# Altium PCB BioZ.PcbDoc (part 1 of 3)
Units mm, origin at the board's own origin, x right, y up, seen from the top; angles counter-clockwise.
Board outline 88 x 75 mm, 4 copper layers (Top Layer, GND1, GND 2, Bottom Layer), stack 1.564 mm thick; 174 components, 106 nets, 519 pads, 307 vias.
Unrouted connection lines stored in the file: 5.
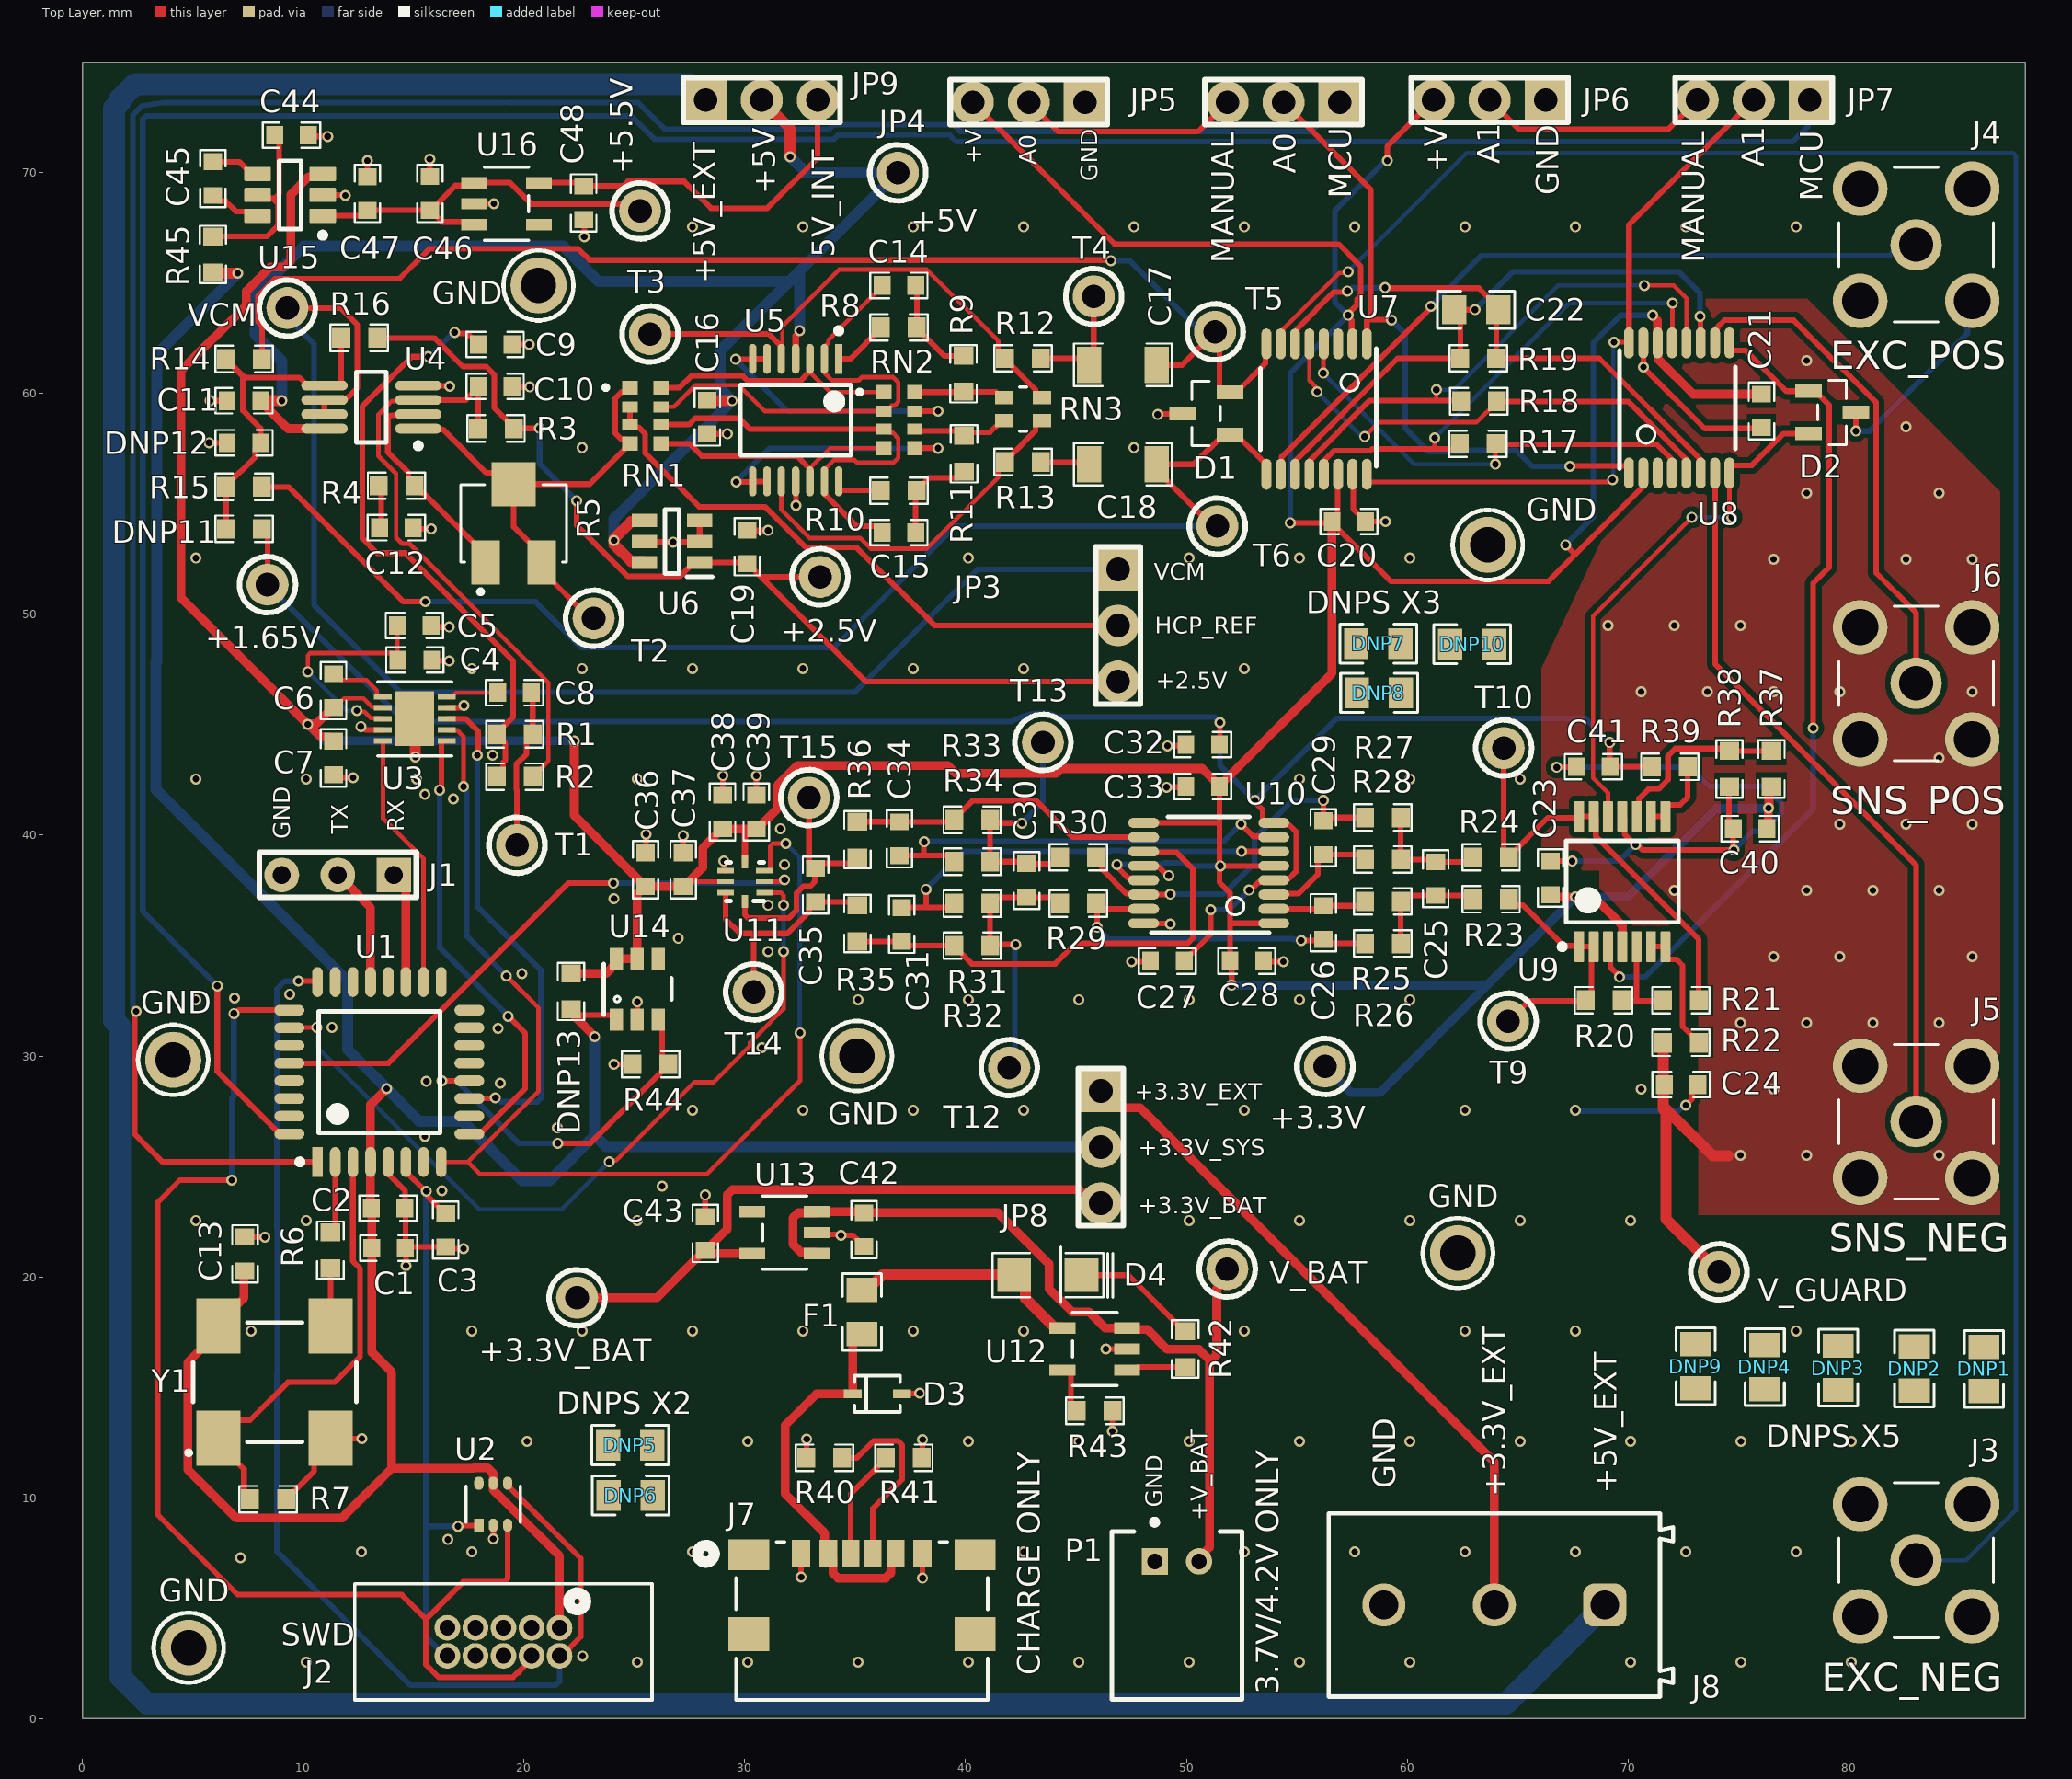
[diagram p0: Top Layer view]
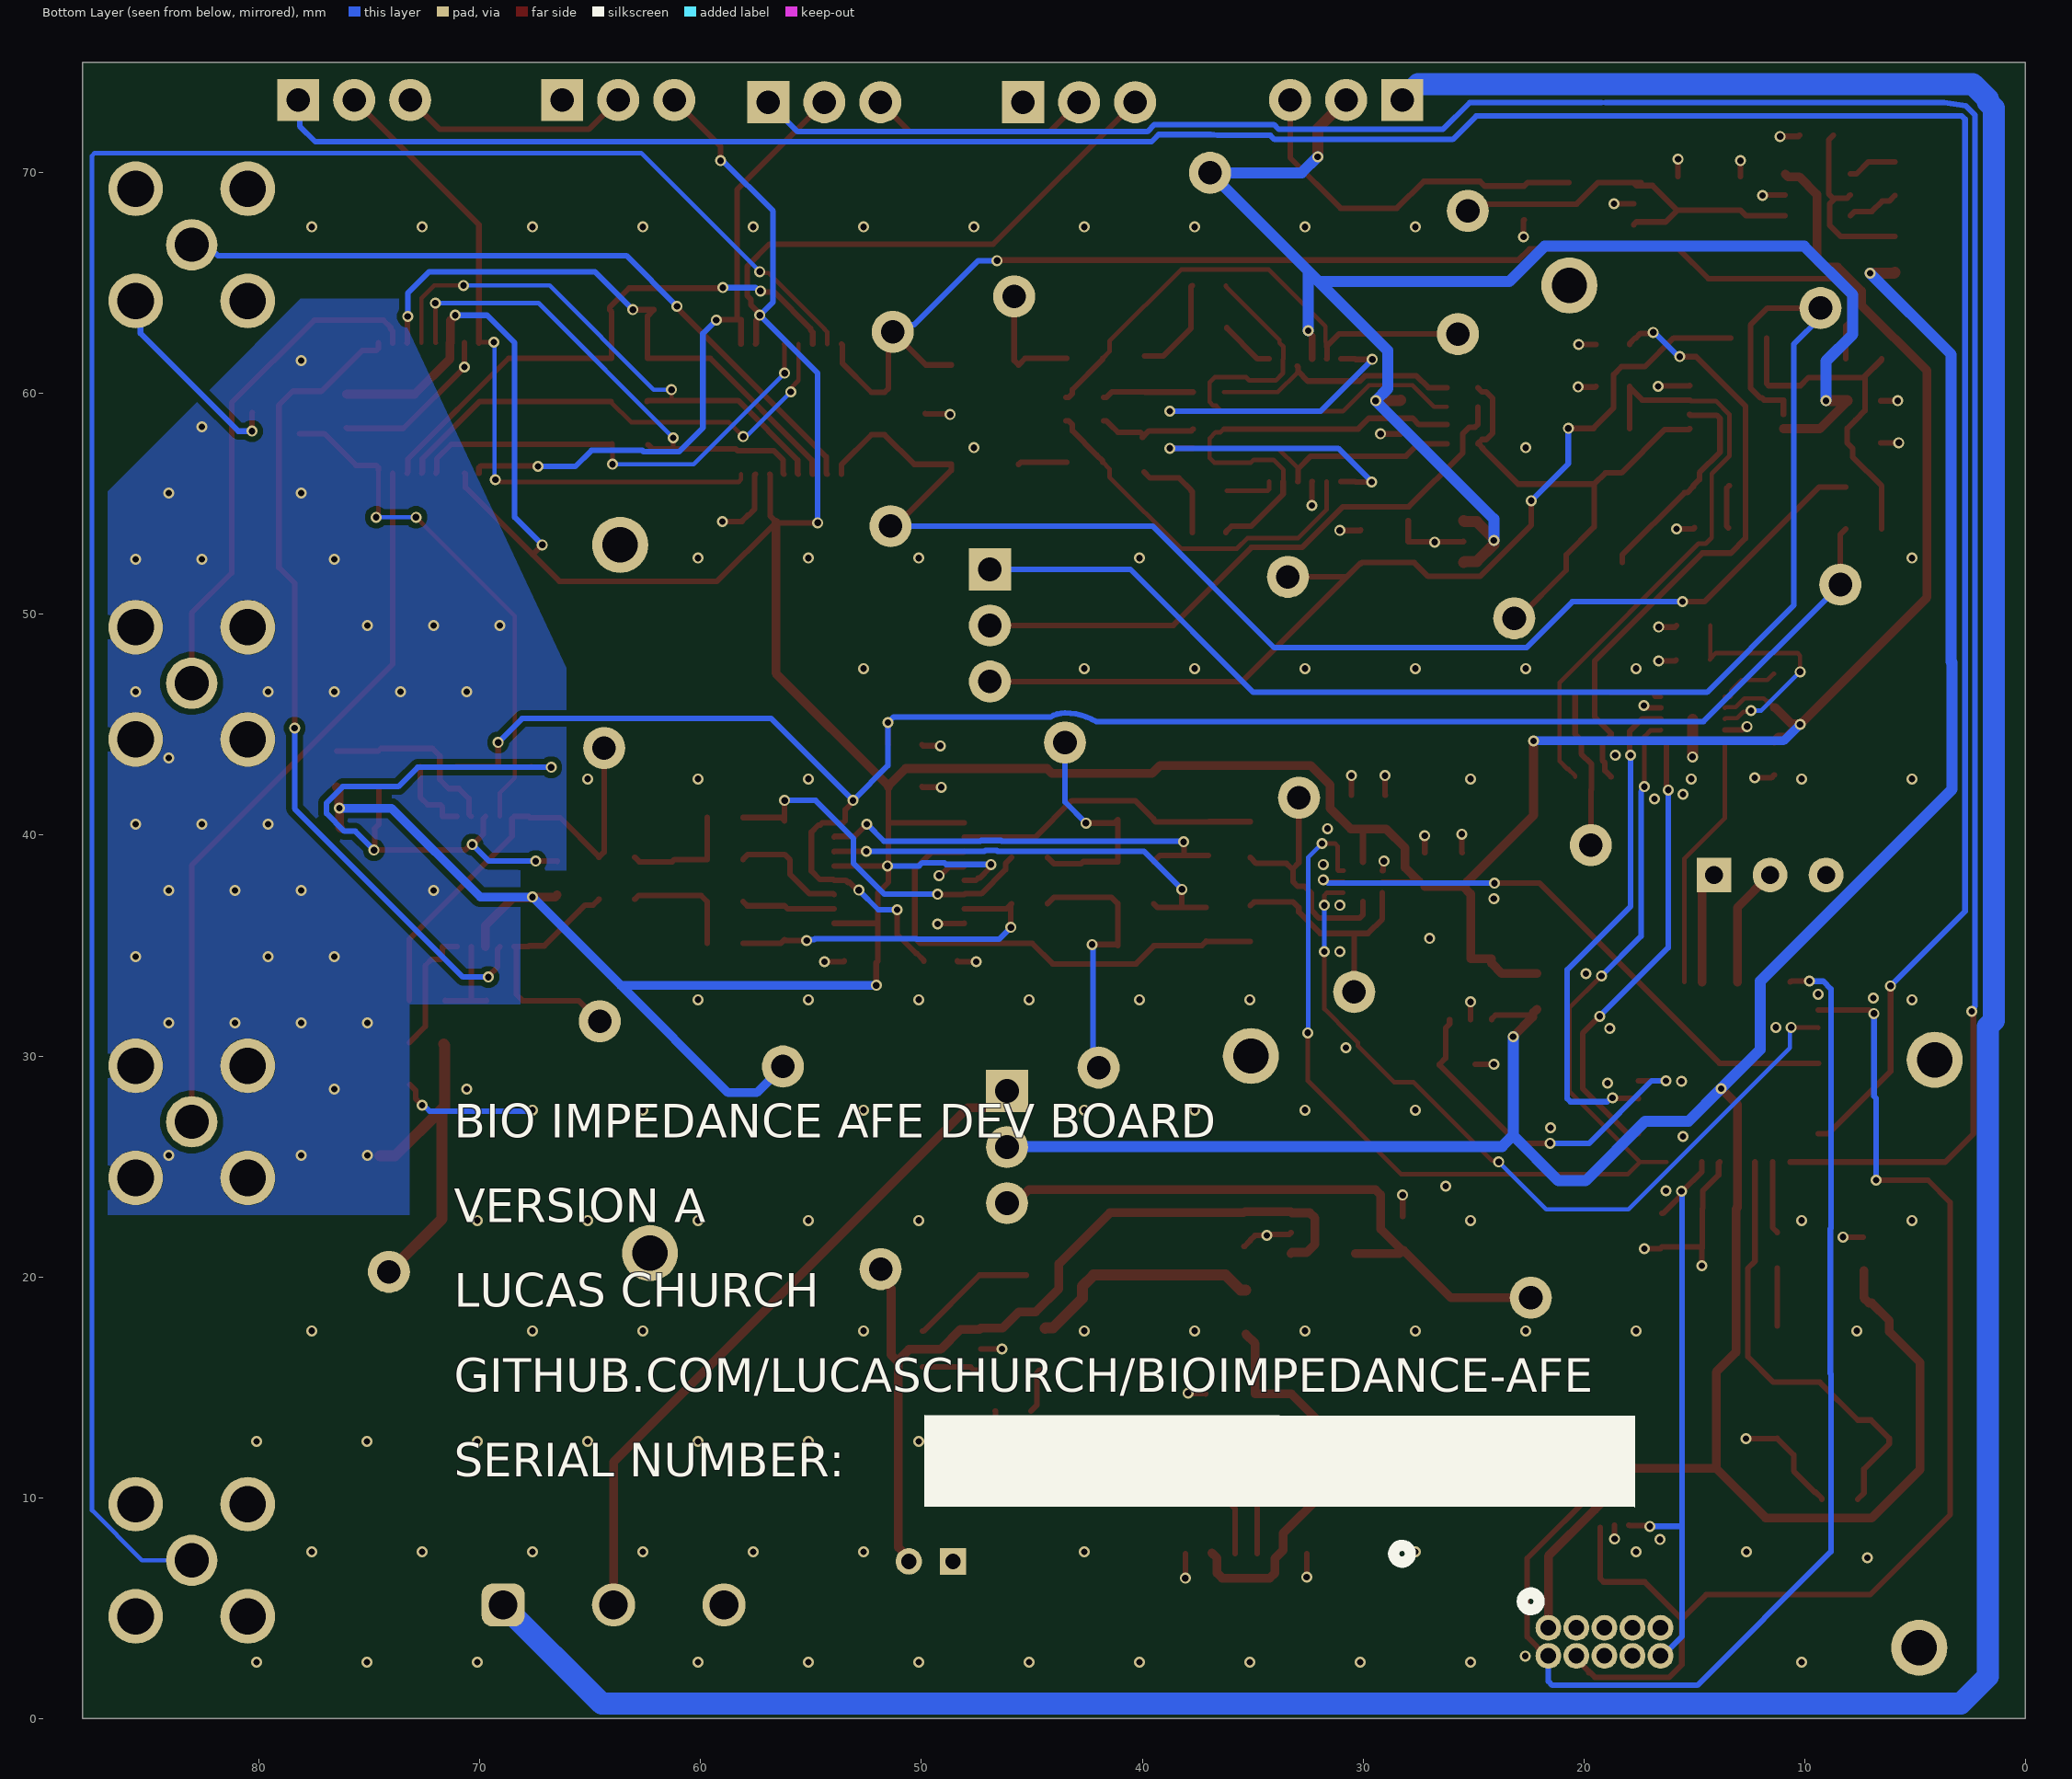
[diagram p1: Bottom Layer view, seen from below]
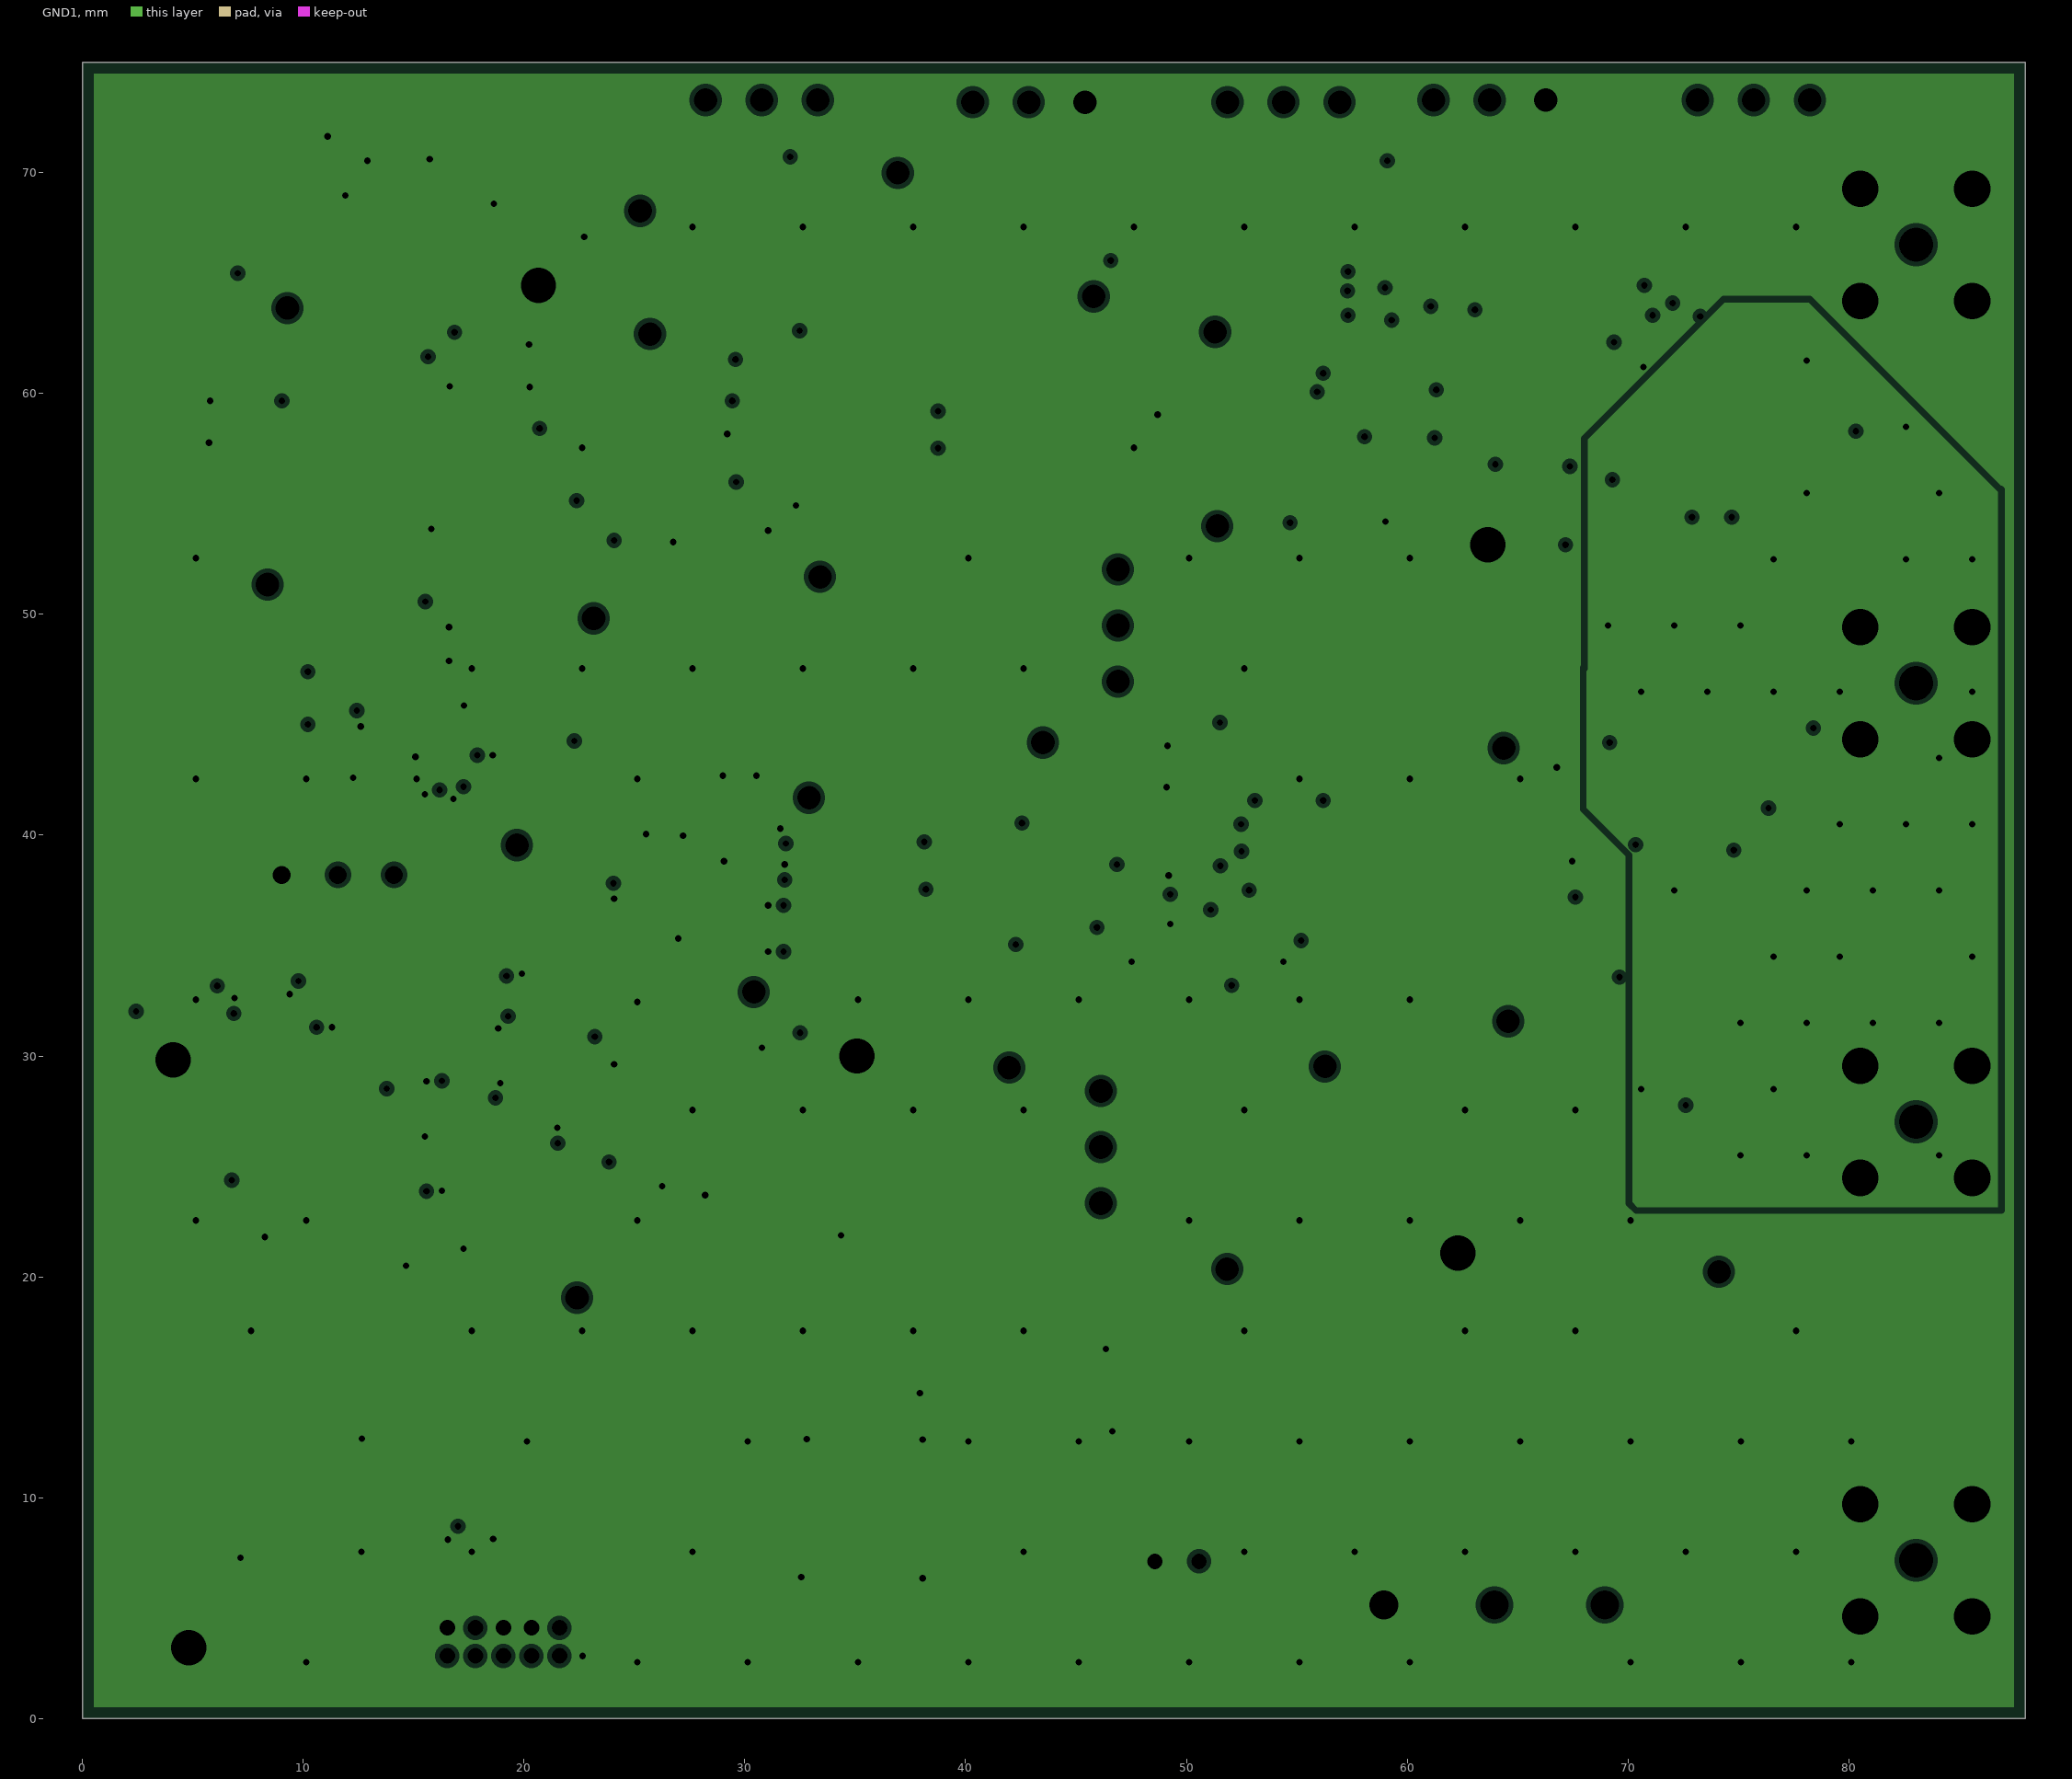
[diagram p2: GND1, clearances drawn from the general rule]
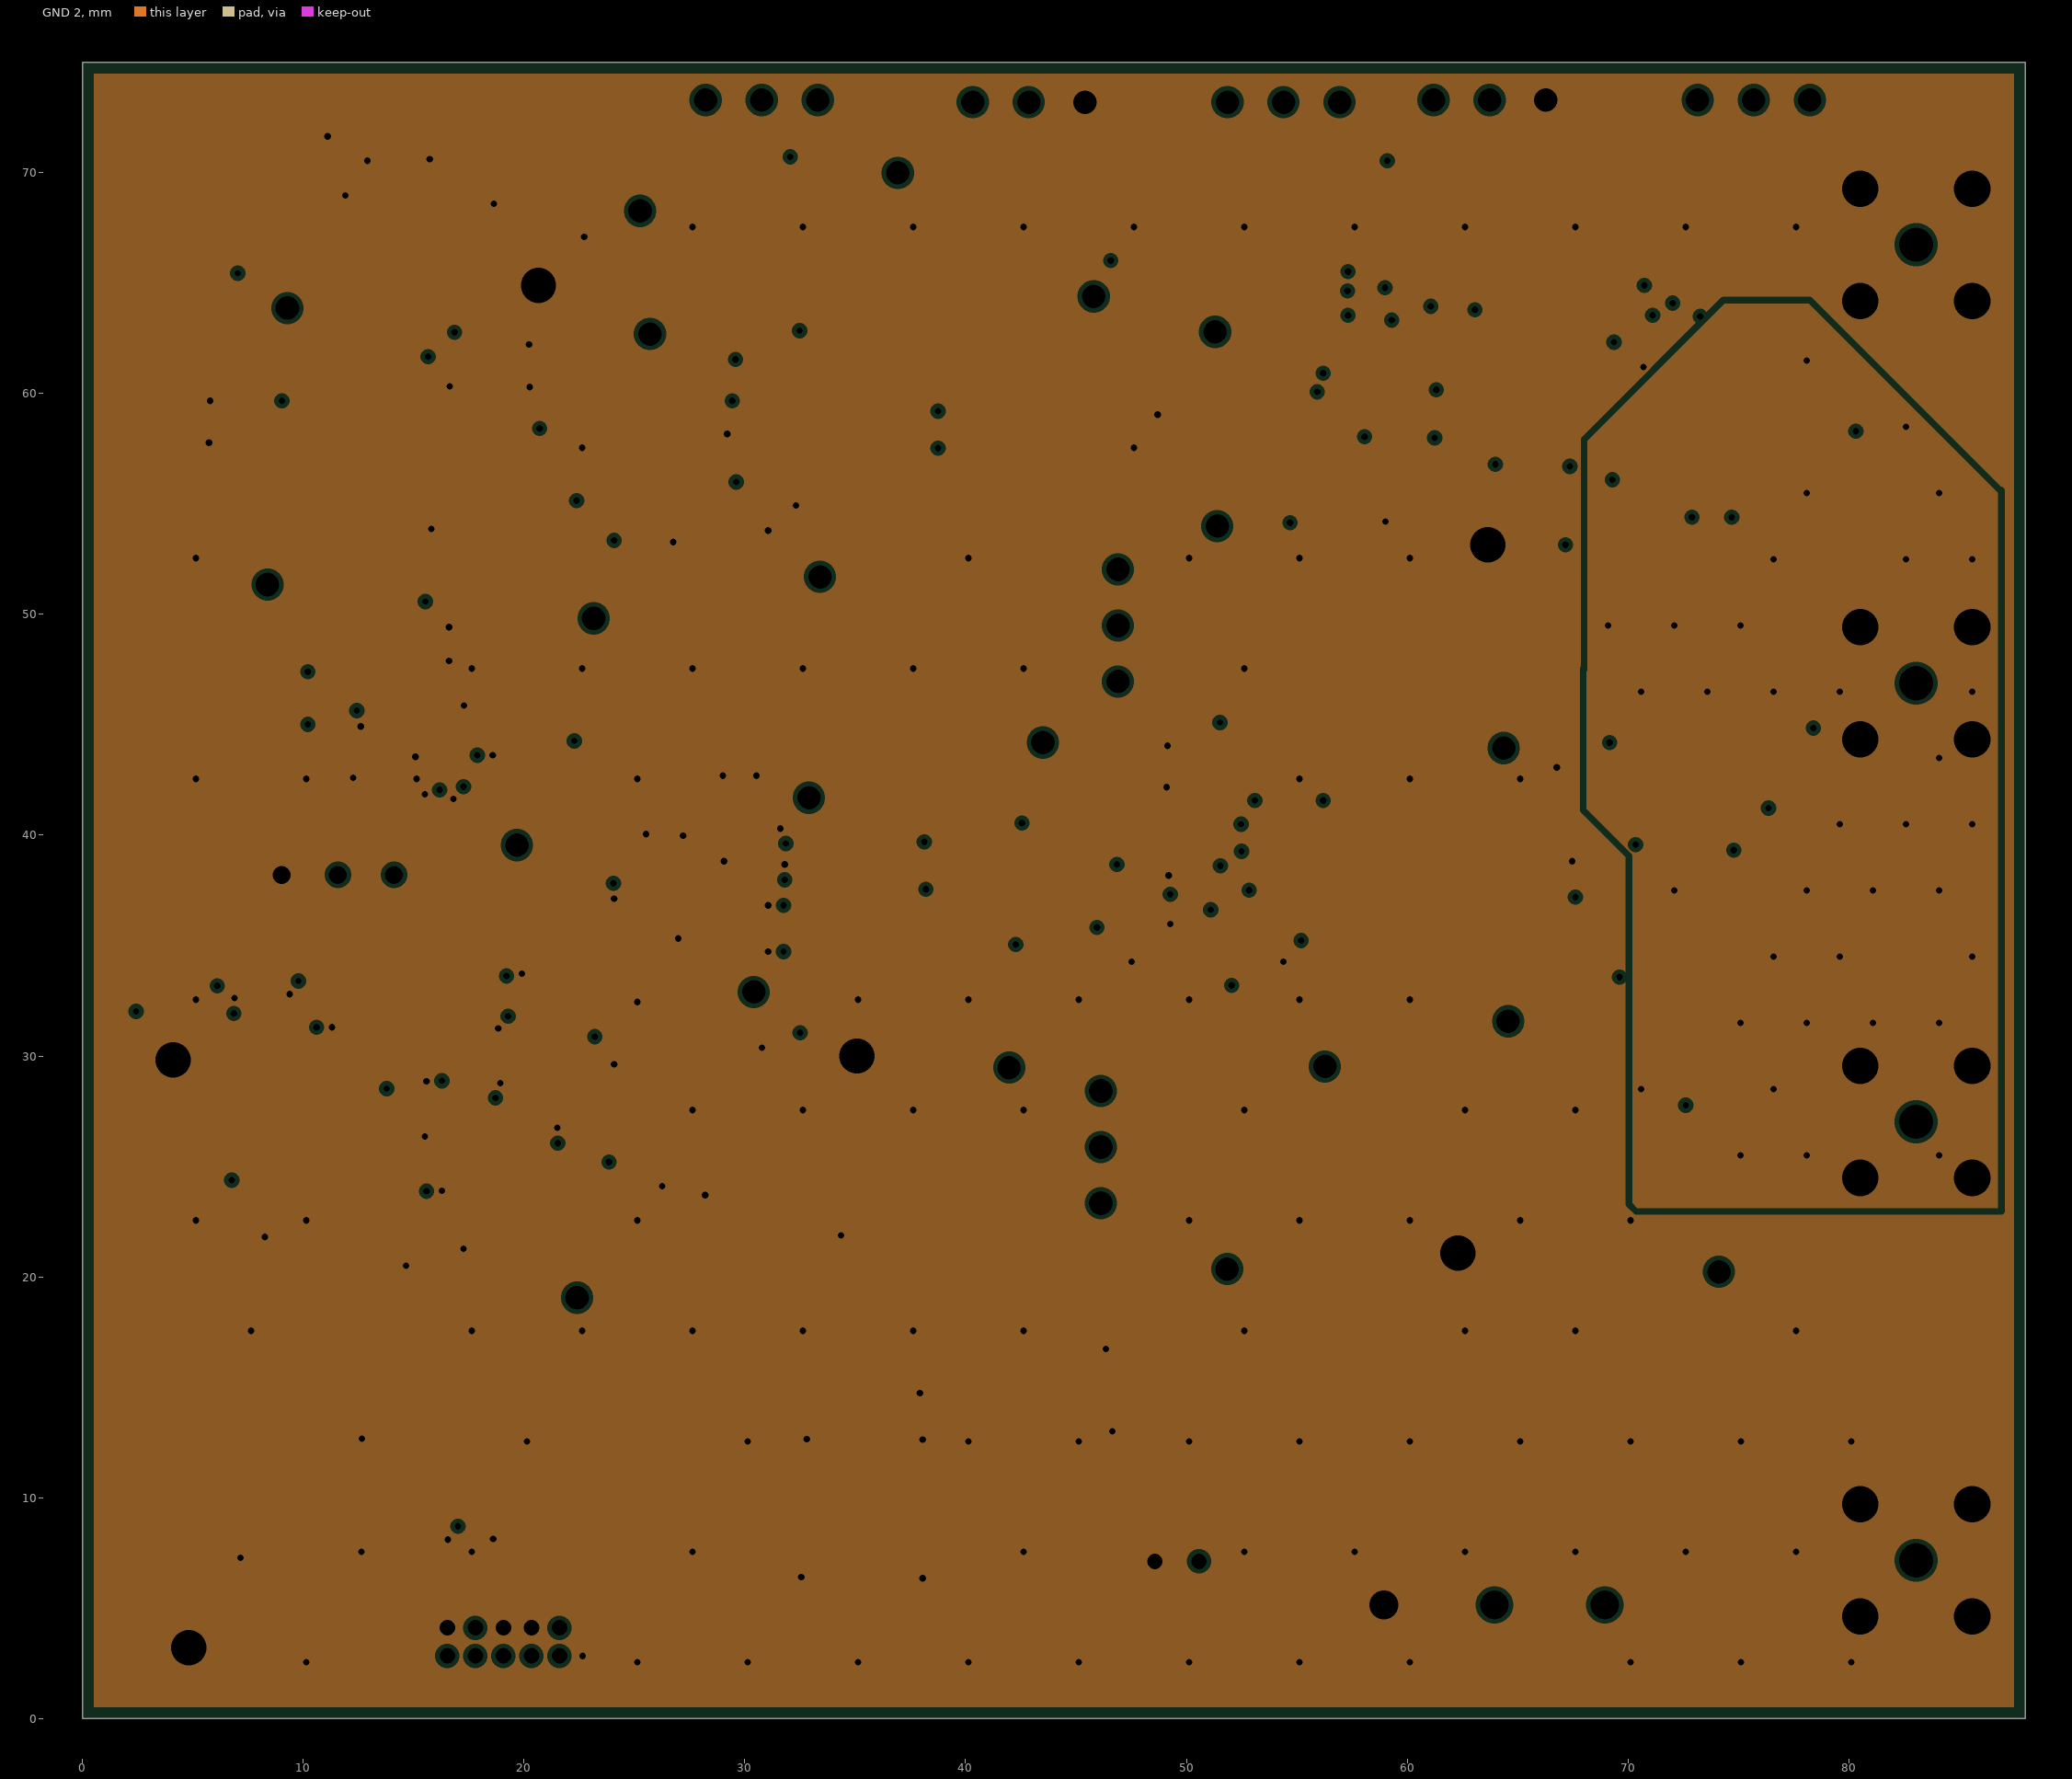
[diagram p3: GND 2, clearances drawn from the general rule]
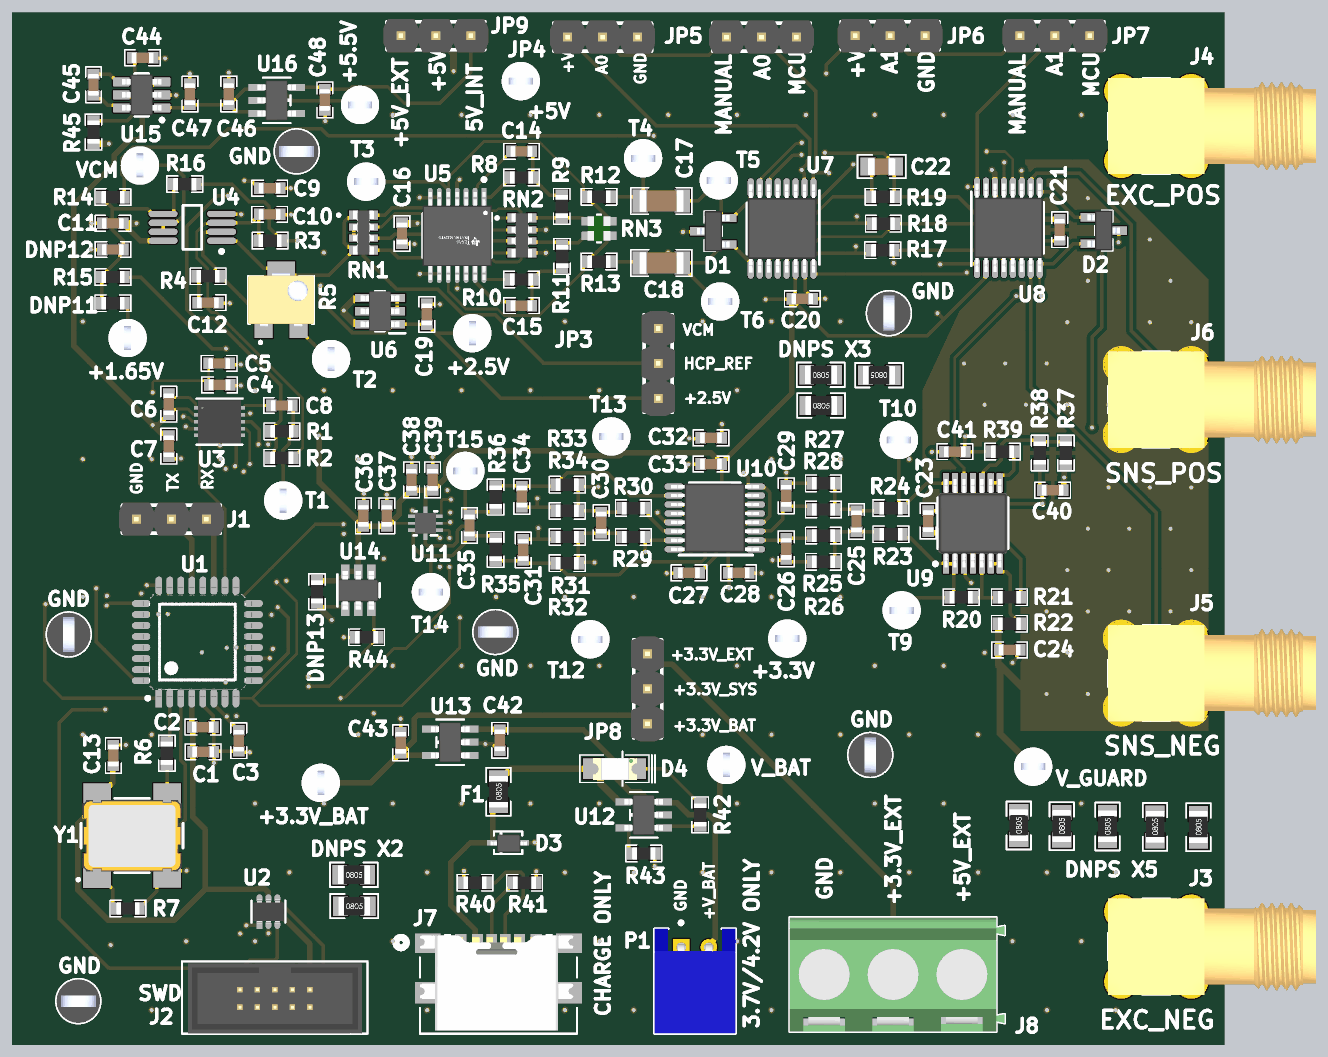
[diagram p5: 3D render of the assembled board from above, using the file's embedded part models]

## Layer stack, top to bottom
Top Solder: solder mask 0.0102, Solder Resist, Dk 3.5
Top Layer: signal copper 0.035
Dielectric 2: prepreg 0.0994, PP-006, Dk 4.1
GND1: plane copper 0.0152, net (Multiple Nets)
Dielectric 1: dielectric 1.265, FR-4, Dk 4.8
GND 2: plane copper 0.0152, net (Multiple Nets)
Dielectric 3: prepreg 0.0994, PP-006, Dk 4.1
Bottom Layer: signal copper 0.035
Bottom Solder: solder mask 0.0102, Solder Resist, Dk 3.5

## Board outline
0,0 88,0 88,75 0,75

## Design rules (kind name [scope] priority, off if disabled: settings)
Clearance [All] p1: gap=0.254 ignorepadtopadclearanceinfootprint=TRUE except(0.01: Text-Text; 0.2: Arc-Arc Arc-Track Arc-SMDPad Arc-Via Track-Track Track-SMDPad Track-Via SMDPad-Via THPad-Via Via-Via; 1: SMDPad-SMDPad)
MinimumSolderMaskSliver [All] p1: minsoldermaskwidth=0.01
PlaneClearance [All] p1: clearance=0.2
PlaneConnect PlaneConnect_1 [All] p1: pad.planeconnectstyle=Relief pad.reliefexpansion=0.508 pad.reliefentries=4 pad.reliefconductorwidth=0.254 pad.reliefairgap=0.254 via.planeconnectstyle=Direct via.reliefexpansion=0.508 via.reliefentries=4 via.reliefconductorwidth=0.254 via.reliefairgap=0.254
PlaneConnect [IsVIA] p2: planeconnectstyle=Direct reliefexpansion=0.508 reliefentries=4 reliefconductorwidth=0.254 reliefairgap=0.254
PolygonConnect Via_To_Polygon [All vs IsVia] p1: connectstyle=Direct reliefconductorwidth=0.254 reliefentries=4 polygonreliefangle="90 Angle" airgapwidth=0.254
PolygonConnect PolygonConnect_1 [All] p2 off: connectstyle=Relief reliefconductorwidth=0.254 reliefentries=4 polygonreliefangle="90 Angle" airgapwidth=0.254
RoutingVias [All] p1: holewidth=0.711 width=1.27 viastyle="Through Hole" minholewidth=0.3 minwidth=0.5 maxholewidth=0.3 maxwidth=0.5
SilkToSolderMaskClearance [IsPad] p1: minsilkscreentomaskgap=0 clearancetoexposedcopper=TRUE
SolderMaskExpansion [All] p1: expansion=0.102 istentingtop=FALSE
SupplyNets "Schematic Supply Nets_13" [InNet('+V_USB')] p1: voltage=0.000
SupplyNets "Schematic Supply Nets_12" [InNet('+3.3V_EXT')] p2: voltage=0.000
SupplyNets "Schematic Supply Nets_11" [InNet('+3.3V_BAT')] p3: voltage=0.000
SupplyNets "Schematic Supply Nets_10" [InNet('+3.3V')] p4: voltage=0.000
SupplyNets "Schematic Supply Nets_9" [InNet('GND')] p5: voltage=0.000
SupplyNets "Schematic Supply Nets_8" [InNet('+V_BAT')] p6: voltage=0.000
SupplyNets "Schematic Supply Nets_7" [InNet('V_GUARD')] p7: voltage=0.000
SupplyNets "Schematic Supply Nets_6" [InNet('+5.5V')] p8: voltage=0.000
SupplyNets "Schematic Supply Nets_5" [InNet('+5V_EXT')] p9: voltage=0.000
SupplyNets "Schematic Supply Nets_4" [InNet('+3.3V_SYS')] p10: voltage=0.000
SupplyNets "Schematic Supply Nets_3" [InNet('+5V')] p11: voltage=0.000
SupplyNets "Schematic Supply Nets_2" [InNet('VCM')] p12: voltage=0.000
SupplyNets "Schematic Supply Nets_1" [InNet('+1.65V')] p13: voltage=0.000
SupplyNets "Schematic Supply Nets" [InNet('+2.5V')] p14: voltage=0.000
Width [All] p1: maxlimit=10 minlimit=0.1 preferedwidth=0.254
26 further rules are at their usual default settings.

## Classes and differential pairs
component class U_SENSE: +1.65V C23 C24 C25 C26 C27 C28 C29 C30 C31 C32 C33 C34 C35 C36 C37 C38 C39 C40 C41 D2 R20 R21 R22 R23 R24 R25 R26 R27 R28 R29 R30 R31 R32 R33 R34 R35 R36 R37 R38 R39 T9 T10 T12 T13 T14 T15 U9 U10 U11 V_GUARD
component class U_POWER: +3.3V +3.3V_BAT +5.5V +5V C42 C43 C44 C45 C46 C47 C48 D3 D4 DNP13 F1 GND J7 J8 JP8 JP9 P1 R40 R41 R42 R43 R44 R45 U12 U13 U14 U15 U16 V_BAT
component class U_MEHCP: +2.5V C14 C15 C16 C17 C18 C19 D1 DNP1 DNP2 DNP3 DNP4 DNP5 DNP6 DNP7 DNP8 DNP11 DNP12 JP3 R8 R9 R10 R11 R12 R13 R14 R15 R16 RN1 RN2 RN3 T2 T3 T4 T5 T6 U5 U6 VCM
component class U_MCU: C1 C2 C3 C4 C5 C6 C7 C8 C9 C10 C11 C12 C13 J1 J2 R1 R2 R3 R4 R6 R7 T1 U1 U2 U3 U4 Y1
component class U_LOADS: C20 C21 C22 J3 J4 J5 J6 JP4 JP5 JP6 JP7 R17 R18 R19 U7 U8

## Components (designator, comment, footprint, x,y, rotation, side; value= is the part's Value field where it differs from the comment)
+1.65V "5002K" "TESTPOINT White" 8.375,51.35 r270 top (schematic designator T16)
+2.5V "5002K" "TESTPOINT White" 33.4,51.7 r90 top (schematic designator T8)
+3.3V "5002K" "TESTPOINT White" 56.275,29.525 r180 top (schematic designator T19)
+3.3V_BAT "5002K" "TESTPOINT White" 22.4,19.05 r90 top (schematic designator T18)
+5.5V "5002K" "TESTPOINT White" 25.25,68.275 r180 top (schematic designator T20)
+5V "5002K" "TESTPOINT White" 36.925,70 r180 top (schematic designator T21)
C1 "100nF" 0603-CAP 14.624,21.3 r180 top
C2 "10uF" 0603-CAP 13.076,23.1 r0 top
C3 "100nF" 0603-CAP 16.45,21.351 r90 top
C4 "10uF" 0603-CAP 14.288,47.942 r0 top
C5 "100nF" 0603-CAP 14.265,49.503 r0 top
C6 "100nF" 0603-CAP 11.367,45.783 r90 top
C7 "100nF" 0603-CAP 11.367,44.259 r270 top
C8 "10uF" 0603-CAP 20.325,46.45 r180 top
C9 "1nF" 0603-CAP 17.925,62.225 r0 top
C10 "100pF" 0603-CAP 17.925,60.325 r0 top
C11 "100nF" 0603-CAP 8.074,59.675 r180 top
C12 "10uF" 0603-CAP 13.451,53.925 r0 top
C13 "100nF" 0603-CAP 7.35,21.799 r270 top
C14 "10pF C0G" 0603-CAP 36.214,64.9 r0 top
C15 "10pF C0G" 0603-CAP 36.214,53.7 r0 top
C16 "100nF" 0603-CAP 28.3,59.7 r270 top
C17 "100nF C0G 1%" 1206-CAP 45.6,61.3 r0 top
C18 "100nF C0G 1%" 1206-CAP 45.6,56.8 r0 top
C19 "100nF" 0603-CAP 30.1,52.3 r90 top
C20 "100nF" 0603-CAP 56.6,54.2 r0 top
C21 "100nF" 0603-CAP 76.05,59.975 r270 top
C22 "22nF C0G 1%" 0805-CAP 64.125,63.8 r180 top
C23 "100nF" 0603-CAP 66.5,37.3 r90 top
C24 "10pF" 0603-CAP 71.65,28.7 r0 top
C25 "470pF" 0603-CAP 61.299,38.794 r270 top
C26 "82pF" 0603-CAP 56.2,36.8 r270 top
C27 "100nF" 0603-CAP 49.9,34.3 r180 top
C28 "10uF" 0603-CAP 51.976,34.3 r0 top
C29 "82pF" 0603-CAP 56.2,39.126 r90 top
C30 "470pF" 0603-CAP 42.763,38.71 r270 top
C31 "82pF" 0603-CAP 37.1,36.724 r270 top
C32 "100nF" 0603-CAP 51.5,44.1 r180 top
C33 "10uF" 0603-CAP 51.5,42.2 r180 top
C34 "82pF" 0603-CAP 37,39.076 r90 top
C35 "1nF" 0603-CAP 33.2,36.976 r90 top
C36 "1nF" 0603-CAP 25.5,37.676 r90 top
C37 "10uF" 0603-CAP 27.2,37.676 r90 top
C38 "10uF" 0603-CAP 28.991,40.288 r90 top
C39 "1nF" 0603-CAP 30.515,40.288 r90 top
C40 "100nF" 0603-CAP 76.3,40.3 r180 top
C41 "10pF" 0603-CAP 69.2,43.1 r180 top
C42 "10uF" 0603-CAP 35.4,22.9 r270 top
C43 "10uF" 0603-CAP 28.2,21.2 r90 top
C44 "2.2uF" 0603-CAP 10.224,71.7 r180 top
C45 "0.22uF" 0603-CAP 5.9,68.976 r90 top
C46 "10uF" 0603-CAP 15.725,68.301 r90 top
C47 "100nF" 0603-CAP 12.9,68.3 r90 top
C48 "10uF" 0603-CAP 22.7,69.4 r270 top
D1 "RCLAMP04022S.C" "SOT-23 3L" 50.9,59.1 r180 top
D2 "RCLAMP04022S.C" "SOT-23 3L" 79.25,59.15 r0 top
D3 "TSD05DYFR" TVS_SOD2_DYF_TEX-L 36,14.7 r0 top
D4 "APT3216LZGCK" 1206-LED 43.725,20.075 r0 top
DNP1 "240R 0.1%" 0805-RES 86.125,14.825 r90 top
DNP2 "240R 0.1%" 0805-RES 82.975,14.85 r90 top
DNP3 "240R 0.1%" 0805-RES 79.525,14.875 r90 top
DNP4 "240R 0.1%" 0805-RES 76.2,14.9 r90 top
DNP5 "240R 0.1%" 0805-RES 23.8,12.375 r0 top
DNP6 "240R 0.1%" 0805-RES 23.825,10.1 r0 top
DNP7 "240R 0.1%" 0805-RES 57.7,48.675 r0 top
DNP8 "240R 0.1%" 0805-RES 57.725,46.45 r0 top
DNP9 "240R 0.1%" 0805-RES 73.075,14.95 r90 top
DNP10 "240R 0.1%" 0805-RES 63.95,48.65 r180 top
DNP11 "10M" 0603-RES 7.312,53.875 r0 top
DNP12 "4.7nF C0G" 0603-CAP 6.55,57.775 r0 top
DNP13 "DNP" 0603-RES 22.125,32.925 r90 top
F1 "MF-PSMF075X-2" 0805-RES 35.305,17.4 r90 top
GND "5011K" "TESTPOINT Black" 4.8,3.2 r0 top (schematic designator T27)
GND "5011K" "TESTPOINT Black" 63.65,53.15 r90 top (schematic designator T26)
GND "5011K" "TESTPOINT Black" 35.075,30 r0 top (schematic designator T25)
GND "5011K" "TESTPOINT Black" 4.1,29.825 r90 top (schematic designator T24)
GND "5011K" "TESTPOINT Black" 20.65,64.9 r0 top (schematic designator T23)
GND "5011K" "TESTPOINT Black" 62.3,21.075 r90 top (schematic designator T22)
J1 "CON3" SIP3 14.1,38.2 r180 top
J2 "3220-10-0100-00" CONN_3220-10-0100-00_CNC 21.6,4.1 r180 top
J3 "RFPC-SMA27-F" GRADCONN_RFPC-SMA27-F 83.06,7.16 r90 top
J4 "RFPC-SMA27-F" GRADCONN_RFPC-SMA27-F 83.06,66.74 r90 top
J5 "RFPC-SMA27-F" GRADCONN_RFPC-SMA27-F 83.06,27.02 r90 top
J6 "RFPC-SMA27-F" GRADCONN_RFPC-SMA27-F 83.06,46.88 r90 top
J7 "USB4135-GF-A" CONN_USB4135-GF-A_GCT 35.3,4.417 r0 top
J8 "691213710003" 691213710003 63.95,5.135 r180 top
JP3 "JUMPER1X3" JUMPER3 46.9,52.04 r270 top
JP4 "JUMPER1X3" JUMPER3 45.4,73.2 r180 top
JP5 "JUMPER1X3" JUMPER3 56.94,73.2 r180 top
JP6 "JUMPER1X3" JUMPER3 66.28,73.3 r180 top
JP7 "JUMPER1X3" JUMPER3 78.24,73.3 r180 top
JP8 "JUMPER1X3" JUMPER3 46.125,28.415 r270 top
JP9 "JUMPER1X3" JUMPER3 28.22,73.3 r0 top
P1 "S2B-PH-K-S(LF)(SN)" JST-S2B-PH-K-S_V 49.575,4.66 r0 top
R1 "49.9R" 0603-RES 19.575,44.575 r180 top
R2 "2.49k" 0603-RES 19.575,42.65 r0 top
R3 "100k" 0603-RES 18.725,58.425 r0 top
R4 "100R" 0603-RES 14.221,55.832 r0 top
R5 "1k" TRIM_PVG5A102C03R00 19.525,54.125 r90 top
R6 "22R" 0603-RES 11.225,21.2 r270 top
R7 "100k" 0603-RES 8.4,9.925 r180 top
R8 "49.9R" 0603-RES 36.976,63 r0 top
R9 "4.99k" 0603-RES 39.9,60.9 r270 top
R10 "49.9R" 0603-RES 36.976,55.6 r0 top
R11 "4.99k" 0603-RES 39.925,57.275 r90 top
R12 "412R" 0603-RES 42.6,61.6 r0 top
R13 "412R" 0603-RES 42.6,56.9 r0 top
R14 "1M" 0603-RES 7.312,61.575 r0 top
R15 "1M" 0603-RES 7.312,55.775 r180 top
R16 "10M" 0603-RES 12.525,62.525 r0 top
R17 "10R 0.05%" 0603-RES 63.2,57.725 r180 top
R18 "100R 0.05%" 0603-RES 63.25,59.65 r180 top
R19 "49.9R 0.05%" 0603-RES 63.225,61.6 r180 top
R20 "100k" 0603-RES 68.9,32.525 r180 top
R21 "100k" 0603-RES 72.4,32.525 r180 top
R22 "22R" 0603-RES 72.4,30.6 r180 top
R23 "210R" 0603-RES 63.8,37.1 r180 top
R24 "210R" 0603-RES 63.8,39 r180 top
R25 "1.87k" 0603-RES 58.9,35.1 r180 top
R26 "412R" 0603-RES 58.9,37 r180 top
R27 "412R" 0603-RES 58.9,38.9 r180 top
R28 "1.87k" 0603-RES 58.9,40.8 r180 top
R29 "210R" 0603-RES 45.1,36.9 r180 top
R30 "210R" 0603-RES 45.1,39 r180 top
R31 "1.87k" 0603-RES 40.3,35 r180 top
R32 "412R" 0603-RES 40.3,36.9 r180 top
R33 "412R" 0603-RES 40.3,38.8 r180 top
R34 "1.87k" 0603-RES 40.3,40.7 r180 top
R35 "33R" 0603-RES 35.1,36 r90 top
R36 "33R" 0603-RES 35.1,39.8 r270 top
R37 "100k" 0603-RES 76.5,43 r270 top
R38 "100k" 0603-RES 74.6,43 r90 top
R39 "22R" 0603-RES 71.9,43.1 r180 top
R40 "5.1k" 0603-RES 33.6,11.8 r180 top
R41 "5.1k" 0603-RES 37.2,11.8 r0 top
R42 "412R" 0603-RES 49.95,16.725 r90 top
R43 "4.99k" 0603-RES 45.85,13.925 r180 top
R44 "1M" 0603-RES 25.725,29.625 r0 top
R45 "10R" 0603-RES 5.9,66.3 r90 top
RN1 "10k" "1206 4-Resistor Network" 25.5,59 r0 top
RN2 "10k" "1206 4-Resistor Network" 37,58.8 r0 top
RN3 "10k" "0606 2-RESISTOR NETWORK" 42.6,59.3 r0 top
T1 "5002K" "TESTPOINT White" 19.675,39.55 r270 top
T2 "5002K" "TESTPOINT White" 23.15,49.825 r270 top
T3 "5002K" "TESTPOINT White" 25.7,62.7 r0 top
T4 "5002K" "TESTPOINT White" 45.8,64.4 r0 top
T5 "5002K" "TESTPOINT White" 51.3,62.8 r0 top
T6 "5002K" "TESTPOINT White" 51.4,54 r0 top
T9 "5002K" "TESTPOINT White" 64.575,31.575 r180 top
T10 "5002K" "TESTPOINT White" 64.375,43.95 r0 top
T12 "5002K" "TESTPOINT White" 41.975,29.475 r180 top
T13 "5002K" "TESTPOINT White" 43.5,44.2 r180 top
T14 "5002K" "TESTPOINT White" 30.4,32.9 r0 top
T15 "5002K" "TESTPOINT White" 32.9,41.7 r0 top
U1 "STM32G071KBT6N" FP-LQFP32-5V-IPC_C 13.443,29.275 r90 top
U2 "D3V3F4U6S-7" SOT-363_DIO 18.6,9.7 r90 top
U3 "AD9837BCPZ-RL7" "LFCSP-WD (3x3) - 10 Pin EPAD" 15.05,45.275 r0 top
U4 "AD8692ARMZ-REEL" ADI-RM-8_M 13.078,59.388 r180 top
U5 "OPA4192IPWR" FP-PW0014A-IPC_C 32.3,58.8 r270 top
U6 "MCP1502T-25E_CHY" SOT95P280X145-6N 26.7,53.3 r180 top
U7 "TMUX1209PWR" PW0016A_N 55.9,59.3 r270 top
U8 "TMUX1209PWR" PW0016A_N 72.325,59.35 r90 top
U9 "OPA4377AIPWR" PW0014A_N 69.75,37.9 r90 top
U10 "THS4552IPWT" PW0016A_N 51.012,38.286 r180 top
U11 "ADS7054IRUGR" "8-X2QFN (1.5x1.5)" 30,37.9 r180 top
U12 "MCP73831T-2ACI/OT" SOT23_DBV_TEX-M 45.85,16.725 r180 top
U13 "TPS7A0233DBVR" SOT23_DBV_TEX-M 31.8,22 r180 top
U14 "TPS22917DBVT" DBV0006_N 25.125,33.025 r90 top
U15 "REG71055DDCR" DDC0006A_M 9.4,69 r180 top
U16 "TPS7A2050PDBVR" SOT23_DBV_TEX-M 19.2,68.6 r0 top
V_BAT "5002K" "TESTPOINT White" 51.85,20.35 r90 top (schematic designator T17)
V_GUARD "5002K" "TESTPOINT White" 74.125,20.225 r180 top (schematic designator T11)
VCM "5002K" "TESTPOINT White" 9.275,63.875 r270 top (schematic designator T7)
Y1 "831018043" WE-SPXO_CFPS-73 8.7,15.225 r0 top

## Footprints (in the part's own frame and the unit in brackets; to place one, negate y for a bottom-side part, rotate by r counter-clockwise, add the part's x,y. Pads: shape width x height; smd on the part's side, far side on the other; paste and mask are expansions set on the pad)
"8-X2QFN (1.5x1.5)" [mm]
  rect 0.75x0.25 smd paste+0 mask+0: 1(-0.9,0.5) 3(-0.875,-0.5) 5(0.875,-0.5) 7(0.875,0.5)
  rect 0.75x0.2 smd paste+0 mask+0: 2(-0.875,0) 6(0.875,0)
  rect 0.3x0.6 smd paste+0 mask+0: 4(0,-0.9) 8(0,0.9)
  silkscreen extent -0.85,-0.87 0.85,0.87, body extent -0.75,-0.75 0.75,0.75, height 0.4
0603-CAP [mil]
  rect 30x33 smd: 1(0,0) 2(60,0)
  silkscreen extent -21,-23 81,23, body extent -1,-16 61,16, height 31
0603-RES [mil]
  rect 32x35 smd: 1(-32,0) 2(32,0)
  silkscreen extent -51,-24 51,24, body extent -34,-18 33,18, height 22
"0606 2-RESISTOR NETWORK" [mm]
  rect 0.837x0.611 smd paste+0 mask+0: 1(-0.857,0.525) 2(-0.857,-0.525) 3(0.857,-0.525) 4(0.857,0.525)
  silkscreen extent -0.15,-1 0.15,1, body extent -0.83,-0.88 0.83,0.88, height 0.56
0805-CAP [mm]
  rect 1.1x1.3 smd: 1(0,0) 2(2,0)
  silkscreen extent -0.75,-0.85 2.75,0.85, body extent 0,-0.62 2,0.63, height 0.85
0805-RES [mm]
  rect 1.1x1.397 smd: 1(0,0) 2(2,0)
  silkscreen extent -0.74,-0.89 2.74,0.89, body extent -0.13,-0.68 2.17,0.68, height 0.76
"1206 4-Resistor Network" [mm]
  rect 0.7x0.64 smd: 1(-0.7,1.27) 4(-0.7,-1.27) 5(0.7,-1.27) 8(0.7,1.27)
  rect 0.7x0.5 smd: 2(-0.7,0.4) 3(-0.7,-0.4) 6(0.7,-0.4) 7(0.7,0.4)
  silkscreen extent -1.9,1.17 -1.7,1.37, body extent -0.75,-1.6 0.75,1.6, height 0.55
1206-CAP [mm]
  rect 1.1x1.65 smd: 1(0,0) 2(3.048,0)
  silkscreen extent -0.69,-0.97 3.75,0.97, body extent -0.06,-0.8 3.14,0.8, height 1.25
1206-LED [mil]
  rect 60x60 smd: 1(-60,0) 2(60,0)
  silkscreen extent -99,-49 116,50, body extent -61,-32 64,31, height 43
691213710003 [mm] "5,00mm - modular - green - Horizontal entry with rising cage clamp -  10,0mm height - 03p"
  rrect50% 1.95x1.95 hole 1.3: 1(-5,0)
  round 1.95 hole 1.3: 2(0,0) 3(5,0)
  silkscreen extent -8.1,-4.15 7.5,4.15, body extent -8.1,-4.15 7.5,4.15, height 10.05
ADI-RM-8_M [mm] "SOP, 8-Leads, Body 3x3mm, Pitch 0.65mm, IPC Low Density"
  oval 2.1x0.45 smd: 1(-2.125,0.975) 2(-2.125,0.325) 3(-2.125,-0.325) 4(-2.125,-0.975) 5(2.125,-0.975) 6(2.125,-0.325) 7(2.125,0.325) 8(2.125,0.975)
  silkscreen extent -2.25,-1.6 0.67,1.87, body extent -1.6,-1.6 1.6,1.6, height 1.1
CONN_3220-10-0100-00_CNC [mil]
  round 46 / inner round 60 / far side round 46 hole 28 paste-99999 mask+0: 1(0,0) 2(0,50) 3(50,0) 4(50,50) 5(100,0) 6(100,50) 7(150,0) 8(150,50) 9(200,0) 10(200,50)
  silkscreen extent -165,-79 365,129, body extent -150,-73 348,128, height 213
CONN_USB4135-GF-A_GCT [mil]
  rect 73x55 smd paste+0 mask+0: 7(-201.77,117.49) 8(201.77,117.49)
  rect 73x61 smd paste+0 mask+0: 9(-201.77,-23.45) 10(201.77,-23.45)
  rect 30x49 smd paste+0 mask+0: A5(-19.68,119.61) B5(19.69,119.61)
  rect 32x49 smd paste+0 mask+0: A9(59.84,119.61) B9(-59.84,119.61)
  rect 33x49 smd paste+0 mask+0: A12(108.27,119.61) B12(-108.27,119.61)
  silkscreen extent -293,-141 224,141, body extent -224,-132 214,140, height 127
DBV0006_N [mm]
  rect 1x0.6 smd paste+0 mask+0: 1(-1.375,0.95) 2(-1.375,0) 3(-1.375,-0.95) 4(1.375,-0.95) 5(1.375,0) 6(1.375,0.95)
  silkscreen extent -1.16,-1.55 1.14,1.52, body extent -1.4,-1.45 1.4,1.45, height 1.2
DDC0006A_M [mm] "SOT23, 6-Leads, Body 3.05x1.75mm, Pitch 0.95mm, IPC Low Density"
  rrect15% 1.2x0.65 smd: 1(-1.475,0.95) 2(-1.475,0) 3(-1.475,-0.95) 4(1.475,-0.95) 5(1.475,0) 6(1.475,0.95)
  silkscreen extent -1.6,-1.55 0.5,1.95, body extent -1.43,-1.48 1.43,1.49, height 0.9
FP-LQFP32-5V-IPC_C [mm]
  rect 1.355x0.486 smd paste+0 mask+0: 1(-4.075,2.8)
  rrect100% 1.355x0.486 smd paste+0 mask+0: 2(-4.075,2) 3(-4.075,1.2) 4(-4.075,0.4) 5(-4.075,-0.4) 6(-4.075,-1.2) 7(-4.075,-2) 8(-4.075,-2.8) 17(4.075,-2.8) 18(4.075,-2) 19(4.075,-1.2) 20(4.075,-0.4) 21(4.075,0.4) 22(4.075,1.2) 23(4.075,2) 24(4.075,2.8)
  rrect100% 0.486x1.355 smd paste+0 mask+0: 9(-2.8,-4.075) 10(-2,-4.075) 11(-1.2,-4.075) 12(-0.4,-4.075) 13(0.4,-4.075) 14(1.2,-4.075) 15(2,-4.075) 16(2.8,-4.075) 25(2.8,4.075) 26(2,4.075) 27(1.2,4.075) 28(0.4,4.075) 29(-0.4,4.075) 30(-1.2,4.075) 31(-2,4.075) 32(-2.8,4.075)
  silkscreen extent -4.2,-2.75 2.75,3.72, body extent -4.85,-4.85 4.85,4.85, height 0.25
FP-PW0014A-IPC_C [mm]
  rect 1.355x0.341 smd paste+0 mask+0: 1(-2.775,1.95)
  rrect100% 1.355x0.341 smd paste+0 mask+0: 2(-2.775,1.3) 3(-2.775,0.65) 4(-2.775,0) 5(-2.775,-0.65) 6(-2.775,-1.3) 7(-2.775,-1.95) 8(2.775,-1.95) 9(2.775,-1.3) 10(2.775,-0.65) 11(2.775,0) 12(2.775,0.65) 13(2.775,1.3) 14(2.775,1.95)
  silkscreen extent -4.17,-2.5 1.6,2.5, body extent -3.55,-2.6 3.55,2.6, height 0.25
GRADCONN_RFPC-SMA27-F [mm]
  round 2.475 hole 1.65: SHLD(-2.54,-2.54) SHLD(-2.54,2.54) SHLD(2.54,-2.54) SHLD(2.54,2.54)
  round 2.325 hole 1.55: SIG(0,0)
  silkscreen extent -3.5,-3.5 3.5,3.5, body extent -3.5,-11.6 3.5,3.5, height 10
JST-S2B-PH-K-S_V [mm] "THD, 2-Leads, Body 7.6x5.9mm, Pitch 2mm"
  rect 1.2x1.2 hole 0.7: 1(-1,2.45)
  round 1.2 hole 0.7: 2(1,2.45)
  silkscreen extent -2.95,-3.8 2.95,4.35, body extent -2.95,-3.8 2.95,3.8, height 4.8
JUMPER3 [mil]
  rect 75x75 hole 42: 1(0,0)
  round 75 hole 42: 2(100,0) 3(200,0)
  silkscreen extent -40,-40 240,40, body extent -50,-47 250,47, height 330
"LFCSP-WD (3x3) - 10 Pin EPAD" [mm]
  rect 0.808x0.255 smd paste+0 mask+0: 1(-1.445,1) 2(-1.445,0.5) 3(-1.445,0) 4(-1.445,-0.5) 5(-1.445,-1) 6(1.445,-1) 7(1.445,-0.5) 8(1.445,0) 9(1.445,0.5) 10(1.445,1)
  rect 1.753x2.489 smd paste+0 mask+0: 11(0,0)
  silkscreen extent -1.68,-1.68 1.68,1.68, body extent -1.55,-1.55 1.55,1.55, height 0.79
PW0014A_N [mm] "SOP, 14-Leads, Body 5.1x4.5mm, Pitch 0.65mm, IPC Medium Density"
  rrect22% 1.4x0.45 smd: 1(-2.95,1.95) 2(-2.95,1.3) 3(-2.95,0.65) 4(-2.95,0) 5(-2.95,-0.65) 6(-2.95,-1.3) 7(-2.95,-1.95) 8(2.95,-1.95) 9(2.95,-1.3) 10(2.95,-0.65) 11(2.95,0) 12(2.95,0.65) 13(2.95,1.3) 14(2.95,1.95)
  silkscreen extent -3.07,-2.55 1.85,2.85, body extent -3.21,-2.5 3.21,2.5, height 1
PW0016A_N [mm]
  oval 1.4x0.45 smd paste+0 mask+0.051: 1(-2.95,2.275) 2(-2.95,1.625) 3(-2.95,0.975) 4(-2.95,0.325) 5(-2.95,-0.325) 6(-2.95,-0.975) 7(-2.95,-1.625) 8(-2.95,-2.275) 9(2.95,-2.275) 10(2.95,-1.625) 11(2.95,-0.975) 12(2.95,-0.325) 13(2.95,0.325) 14(2.95,0.975) 15(2.95,1.625) 16(2.95,2.275)
  silkscreen extent -2.75,-2.55 2.6,2.7, body extent -3.2,-2.5 3.2,2.5, height 1.13
SIP3 [mil]
  rect 62x62 hole 32: 1(0,0)
  round 62 hole 32: 2(100,0) 3(200,0)
  silkscreen extent -40,-40 240,40, body extent -50,-47 250,47, height 330
SOT23_DBV_TEX-M [mil]
  rect 46.15x20 smd paste+0 mask+0: 1(-57.58,37.4) 2(-57.58,0) 3(-57.58,-37.4) 4(57.58,-37.4) 5(57.58,37.4)
  silkscreen extent -40,-65 40,65, body extent -55,-57 55,57, height 47
SOT95P280X145-6N [mm]
  rect 1.15x0.6 smd: 1(-1.25,0.95) 2(-1.25,0) 3(-1.25,-0.95) 4(1.25,-0.95) 5(1.25,0) 6(1.25,0.95)
  silkscreen extent -1.83,-1.45 0.33,1.6, body extent -1.4,-1.45 1.4,1.45, height 1.2
"SOT-23 3L" [mm]
  rect 1.21x0.61 smd: 1(-1.07,0.96) 2(-1.07,-0.96) 3(1.07,0)
  silkscreen extent -0.65,-1.46 0.65,1.46, body extent -1.18,-1.46 1.18,1.46, height 1.22
SOT-363_DIO [mm]
  rect 0.6x0.42 smd paste+0 mask+0: 1(-0.95,0.65)
  oval 0.6x0.42 smd paste+0 mask+0: 2(-0.95,0) 3(-0.95,-0.65) 4(0.95,-0.65) 5(0.95,0) 6(0.95,0.65)
  silkscreen extent -0.8,-1.23 0.8,1.23, body extent -0.9,-1.1 0.9,1.1, height 1
"TESTPOINT Black" [mil]
  round 100 hole 63: 1(0,0)
  silkscreen extent -63,-62 63,62, body extent -63,-62 62,63, height 320
"TESTPOINT White" [mil]
  round 75 hole 42: 1(0,0)
  silkscreen extent -50,-50 50,50, body extent -50,-50 50,50, height 180
TRIM_PVG5A102C03R00 [mm]
  rect 2x1.3 smd: 1(-1.778,1.27) 3(-1.778,-1.27)
  rect 2x2 smd: 2(1.778,0)
  silkscreen extent -3.2,-2.4 1.75,2.4, body extent -1.95,-2.4 1.95,2.4, height 5.3
TVS_SOD2_DYF_TEX-L [mm]
  rect 0.806x0.376 smd paste+0 mask+0: 1(-1.118,0) 2(1.118,0)
  silkscreen extent -1.03,-0.83 1.03,0.83, body extent -1.27,-0.69 1.38,0.61, height 0.9
WE-SPXO_CFPS-73 [mm]
  rect 2x2.5 smd paste+0.017 mask+0.102: 1(-2.54,-2.54)
  rect 2x2.5 smd paste+0 mask+0.102: 2(2.54,-2.54) 3(2.54,2.54) 4(-2.54,2.54)
  silkscreen extent -4,-3.3 3.7,2.7, body extent -3.6,-2.62 3.6,2.58, height 1.35

## Part data
+1.65V +2.5V +3.3V +3.3V_BAT +5.5V +5V T1 T2 T3 T4 T5 T6 T9 T10 T12 T13 T14 T15 V_BAT V_GUARD VCM: "PC TEST POINT MINIATURE WHITE", Manufacturer 1="Keystone Electronics", Supplier Part Number 1=36-5002-ND, Detailed Description="Connector, TestPoint White", Location=F1-33, Manufacturer Part Number 1=5002K, Price(1)=0.56, Price(10)=0.506, Price(100)=0.3541, Supplier 1=DigiKey, Supplier 2=Mouser, Supplier Part Number 2=534-5002, Tech#=T/H
C1 C3 C5 C6 C7 C11 C13 C16 C19 C20 C21 C23 C27 C32 C40 C47: library part CGA3E2C0G1H472J080AA, "CAP CER 100 NF 50V X7R 0603", Manufacturer 1=YAGEO, Manufacturer Part Number 1=CC0603KRX7R9BB104, Supplier Part Number 1=311-1344-1-ND, Detailed Description="CAP CER 100 NF 50V X7R 0603", Price(100)=0.1434, Price(250)=0.10756, Supplier 1=DigiKey, Supplier 2=Mouser, Supplier Part Number 2=810-CGA3E2C0G1H472J, Tech#=SMT
C2 C4 C8 C12 C28 C33 C37 C38 C42 C43 C46 C48: library part CGA3E2C0G1H472J080AA, "CAP CER 10uF 6.3V X5R 0603", Manufacturer 1="Murata Electronics", Manufacturer Part Number 1=GRM188R60J106KE47D, Supplier Part Number 1=490-12538-1-ND, Detailed Description="CAP CER 100 NF 50V X7R 0603", Price(100)=0.1434, Price(250)=0.10756, Supplier 1=DigiKey, Supplier 2=Mouser, Supplier Part Number 2=810-CGA3E2C0G1H472J, Tech#=SMT
C9 C35 C36 C39: library part CGA3E2C0G1H472J080AA, "CAP CER 1000 PF 50V C0G 0603", Manufacturer 1=Murata, Manufacturer Part Number 1=GRM1885C1H102JA01D, Supplier Part Number 1=490-1451-1-ND, Detailed Description="CAP CER 100 NF 50V X7R 0603", Price(100)=0.1434, Price(250)=0.10756, Supplier 1=DigiKey, Supplier 2=Mouser, Supplier Part Number 2=810-CGA3E2C0G1H472J, Tech#=SMT
C10: library part CGA3E2C0G1H472J080AA, "CAP CER 100 PF 50V C0G 0603", Manufacturer 1=YAGEO, Manufacturer Part Number 1=CC0603JRNPO9BN101, Supplier Part Number 1=311-1069-1-ND, Detailed Description="CAP CER 100 PF 50V C0G 0603", Price(100)=0.1434, Price(250)=0.10756, Supplier 1=DigiKey, Supplier 2=Mouser, Supplier Part Number 2=810-CGA3E2C0G1H472J, Tech#=SMT
C14 C15: library part CGA3E2C0G1H472J080AA, "CAP CER 10PF 50V C0G 0603", Manufacturer 1=Murata, Manufacturer Part Number 1=CC0603JRNPO9BN100, Supplier Part Number 1=311-1058-1-ND, Detailed Description="CAP CER 10PF 50V C0G 0603", Price(100)=0.1434, Price(250)=0.10756, Supplier 1=DigiKey, Supplier 2=Mouser, Supplier Part Number 2=810-CGA3E2C0G1H472J, Tech#=SMT
C17 C18: library part GRM31C5C1H104JA01L, "CAP CER 0.1UF 1% 50V C0G/NP0 1206", Manufacturer 1=Murata, Manufacturer Part Number 1=GRT31C5C1H104FA02L, Supplier Part Number 1=490-GRT31C5C1H104FA02LCT-ND, Detailed Description="CAP CER 0.1UF 1% 50V C0G/NP0 1206", Price(100)=0.2317, Supplier 1=DigiKey, Supplier 2=Mouser, Supplier Part Number 2=81-GRM31C5C1H104JA1L, Tech#=SMT
C22: library part GCM21B5C1H223JA16L, "CAP CER 0.022UF 50V C0G/NP0 0805", Manufacturer 1=Murata, Manufacturer Part Number 1=GCM21B5C1H223FA16L, Supplier Part Number 1=490-GCM21B5C1H223FA16LCT-ND, Detailed Description="CAP CER 0.022UF 50V C0G/NP0 0805", Price(100)=0.1789, Supplier 1=DigiKey, Supplier 2=Mouser, Supplier Part Number 2=81-GCM21B5C1H223JA6L, Tech#=SMT
C24 C41: library part CGA3E2C0G1H472J080AA, "CAP CER 10PF 50V C0G/NPO 0603", Manufacturer 1=YAGEO, Manufacturer Part Number 1=CC0603JRNPO9BN100, Supplier Part Number 1=311-1058-1-ND, Detailed Description="CAP CER 10PF 50V C0G/NPO 0603", Price(100)=0.1434, Price(250)=0.10756, Supplier 1=DigiKey, Supplier 2=Mouser, Supplier Part Number 2=810-CGA3E2C0G1H472J, Tech#=SMT
C25 C30: library part CGA3E2C0G1H472J080AA, "CAP CER 470PF 50V C0G 0603", Manufacturer 1=Samsung, Manufacturer Part Number 1=CL10C471JB8NNNC, Supplier Part Number 1=1276-1168-1-ND, Detailed Description="CAP CER 470PF 50V C0G 0603", Price(100)=0.1434, Price(250)=0.10756, Supplier 1=DigiKey, Supplier 2=Mouser, Supplier Part Number 2=810-CGA3E2C0G1H472J, Tech#=SMT
C26 C29 C31 C34: library part CGA3E2C0G1H472J080AA, "CAP CER 82PF 50V C0G 0603", Manufacturer 1=KEMET, Manufacturer Part Number 1=C0603C820J5GACTU, Supplier Part Number 1=399-C0603C820J5GACTUCT-ND, Detailed Description="CAP CER 82PF 50V C0G 0603", Price(100)=0.1434, Price(250)=0.10756, Supplier 1=DigiKey, Supplier 2=Mouser, Supplier Part Number 2=810-CGA3E2C0G1H472J, Tech#=SMT
C44: library part CGA3E2C0G1H472J080AA, "CAP CER 2.2UF 35V X5R 0603", Manufacturer 1="Murata Electronics", Manufacturer Part Number 1=GRM188R6YA225MA12D, Supplier Part Number 1=490-10486-1-ND, Detailed Description="CAP CER 2.2UF 35V X5R 0603", Price(100)=0.1434, Price(250)=0.10756, Supplier 1=DigiKey, Supplier 2=Mouser, Supplier Part Number 2=810-CGA3E2C0G1H472J, Tech#=SMT
C45: library part CGA3E2C0G1H472J080AA, "CAP CER 0.22UF 25V X7R 0603", Manufacturer 1="Murata Electronics", Manufacturer Part Number 1=GRM188R71E224KA88D, Supplier Part Number 1=490-3290-1-ND, Detailed Description="CAP CER 0.22UF 25V X7R 0603", Price(100)=0.1434, Price(250)=0.10756, Supplier 1=DigiKey, Supplier 2=Mouser, Supplier Part Number 2=810-CGA3E2C0G1H472J, Tech#=SMT
D3: "5-V 60-A Unidirectional surge protection device 2-SOT -40 to 125", Manufacturer_Name="Texas Instruments", Copyright="Copyright (C) 2026 Ultra Librarian. All rights reserved.", Manufacturer_Part_Number=TSD05DYFR, RefDes=RefDes, Type=Type
D4: "LED GREEN CLEAR 2SMD", Colour=Green, Manufacturer 1=Kingbright, Supplier Part Number 1=754-1944-1-ND, Detailed Description="LED, Green SMT1206 2.65V 2mA 50mcd", Location=#N/A, Manufacturer Part Number 1=APT3216LZGCK, Price(1)=0.94, Price(10)=0.725, Price(25)=0.6076, Price(100)=0.5233, Spec="2.65V 2mA 50mcd", Supplier 1=DigiKey, Supplier 2=Mouser, Supplier Part Number 2=604-APT3216LZGCK, Tech#=SMT
DNP1 DNP2 DNP3 DNP4 DNP5 DNP6 DNP7 DNP8 DNP9 DNP10: "RES SMD 240 OHM 0.1% 1/8W 0805", Manufacturer 1=Susumu, Manufacturer Part Number 1=RG2012P-241-B-T5, Supplier Part Number 1=754-RG2012P-241-BT5, Detailed Description="RES SMD 240 OHM 0.1% 1/8W 0805", Price(100)=0.149, Supplier 1=Mouser, Supplier 2=DigiKey, Supplier Part Number 2=RG20P240BCT-ND, Tech#=SMT
DNP11 R16: library part "4.99K 0603", "RES SMD 10MOHM 1% 1/10W 0603", Manufacturer 1=YAGEO, Manufacturer Part Number 1=RC0603FR-0710ML, Supplier Part Number 1=311-10.0MHRCT-ND, Detailed Description="RES SMD 10MOHM 1% 1/10W 0603", Price(100)=0.023, Supplier 1=DigiKey, Supplier 2=Mouser, Supplier Part Number 2=754-RR0816P-4991D68H, Tech#=SMT
DNP12: library part CGA3E2C0G1H472J080AA, "CAP CER 4700PF 50V C0G 0603", Manufacturer 1=Murata, Manufacturer Part Number 1=GRM1885C1H472JA01D, Supplier Part Number 1=490-9669-1-ND, Detailed Description="CAP CER 4700PF 50V C0G 0603", Price(100)=0.1434, Price(250)=0.10756, Supplier 1=DigiKey, Supplier 2=Mouser, Supplier Part Number 2=810-CGA3E2C0G1H472J, Tech#=SMT
DNP13 R40 R41: library part "4.99K 0603", "RES SMD 5.1K OHM 0.1% 1/10W 0603", Manufacturer 1=Susumu, Manufacturer Part Number 1=RG1608P-512-B-T5, Supplier Part Number 1=RG16P5.1KBCT-ND, Detailed Description="RES SMD 5.1K OHM 0.1% 1/10W 0603", Price(100)=0.023, Supplier 1=DigiKey, Supplier 2=Mouser, Supplier Part Number 2=754-RR0816P-4991D68H, Tech#=SMT
F1: library part "240R 0.1%", "PTC RESET FUSE 6V 750MA 0805", Manufacturer 1=Bourns, Supplier Part Number 1=MF-PSMF075X-2CT-ND, Detailed Description="PTC RESET FUSE 6V 750MA 0805", Manufacturer Part Number 1=MF-PSMF075X-2, Price(100)=0.149, Supplier 1=Digikey, Supplier 2=DigiKey, Supplier Part Number 2=RG20P240BCT-ND, Tech#=SMT
GND GND GND GND GND GND: "PC TEST POINT MULTIPURPOSE BLACK", Manufacturer 1="Keystone Electronics", Supplier Part Number 1=36-5011-ND, Detailed Description="Connector, TestPoint Black", Location=F1-34, Manufacturer Part Number 1=5011K, Price(1)=0.57, Price(10)=0.506, Price(100)=0.3541, Supplier 1=DigiKey, Supplier 2=Mouser, Supplier Part Number 2=534-5011, Tech#=T/H
J1: "Connector"
J2: "Description", Manufacturer_Name="CNC Tech", Copyright="Copyright (C) 2025 Ultra Librarian. All rights reserved.", Manufacturer_Part_Number=3220-10-0100-00, RefDes=RefDes, Type=Type
J3 J4 J5 J6: Package=None, Availability=Unavailable, MF="{'manufacturer': u'GCT (Gradconn)'}", MP=RFPC-SMA27-F, Price=None
J7: "Description", Manufacturer_Name="Global Connector Technology", Copyright="Copyright (C) 2026 Ultra Librarian. All rights reserved.", Manufacturer_Part_Number=USB4135-GF-A, RefDes=RefDes, Type=Type
J8: library part CMP-1502-02527-3, "213 Series 5MM Pitch Straight, Pcb Terminal Block, Through Hole, 3 Way", Color=Green, Current=10A, Max Operating Temperature=105°C, Min Operating Temperature=-40°C, Voltage=300V, Connector Type="PCB, Terminal Block", Contact Material=Brass, Contact Plating=Tin, Height=10mm, Housing Material=Nylon, Lead Pitch=5mm, Length=8.3mm, Mount="Through Hole", Number of Contacts=3, Number of Levels=1, Number of Pins=3, Number of Positions Per Level=3, Packaging=Box, Pitch=5.0038mm, Plating="Brass, Steel", REACH SVHC=Unknown, RoHS=Compliant, Stripping Length=-7mm, Termination=Screw, Width=15.6mm, Wire Gauge (Max)=26AWG, Wire Gauge (Min)=16AWG, Wire/Cable Gauge=16AWG
JP3 JP4 JP5 JP6 JP7 JP8 JP9: library part 68001-203HLF, "CONN HEADER VERT 36POS 2.54MM", Manufacturer 1=FCI, Supplier Part Number 1=609-3470-ND, Detailed Description="Jumper, 1x3 Vertical T/H 0.1in", Location=#N/A, Manufacturer Part Number 1=68001-203HLF, Notes="Can be 68001-236HLF cut to length", Price(1)=0.43, Price(10)=0.32, Price(25)=0.32, Price(100)=0.2436, Supplier 1=DigiKey, Supplier 2=Mouser, Supplier Part Number 2=649-68001-203HLF, Tech#=T/H
P1: library part CMP-1755-00004-1, "Male Header, Pitch 2 mm, 1 x 2 Position, Height 4.8 mm, Tail Length 3.4 mm, -25 to 85 degC, RoHS, Bulk", Capacitance="10 uF", Case\Package=Radial, Max Operating Temperature="85 degC", Min Operating Temperature="-40 degC", Package Quantity=200, Tolerance=20%, Voltage Rating="50 V", ComponentLink1Description=Datasheet, ComponentLink1URL=http://www.jst-mfg.com/product/pdf/eng/ePH.pdf, DatasheetVersion=Dec-12, Diameter="5 mm", Height="11 mm", Lead Pitch="2 mm", Length="11 mm", Mount="Through Hole", PackageDescription="Male Header, Pitch 2 mm, 1 x 2 Position, Height 4.8 mm, Tail Length 3.4 mm", PackageReference=S2B-PH-K-S, Packaging=Bulk, Pins=2, Radiation Hardening=No, REACH SVHC="No SVHC", RoHSCompliant=true, Voltage Rating (DC)="50 V"
R1 R8 R10: library part "4.99K 0603", "RES SMD 49.9OHM 0.1% 1/10W 0603", Manufacturer 1=Yageo, Manufacturer Part Number 1=RT0603BRD0749R9L, Supplier Part Number 1=YAG1672CT-ND, Detailed Description="RES SMD 49.9OHM 0.1% 1/10W 0603", Price(100)=0.023, Supplier 1=DigiKey, Supplier 2=Mouser, Supplier Part Number 2=754-RR0816P-4991D68H, Tech#=SMT
R2: library part "4.99K 0603", "RES SMD 2.49kOHM 0.1% 1/10W 0603", Manufacturer 1=Panasonic, Manufacturer Part Number 1=ERA-3AEB2491V, Supplier Part Number 1="RES SMD 2.49KOHM 0.1% 1/10W 0603", Detailed Description="RES SMD 2.49kOHM 0.1% 1/10W 0603", Price(100)=0.023, Supplier 1=DigiKey, Supplier 2=Mouser, Supplier Part Number 2=754-RR0816P-4991D68H, Tech#=SMT
R3 R7 R20 R21 R37 R38: library part "4.99K 0603", "RES SMD 100KOHM 0.1% 1/10W 0603", Manufacturer 1=YAGEO, Manufacturer Part Number 1=RT0603BRD07100KL, Supplier Part Number 1=YAG1235CT-ND, Detailed Description="RES SMD 4.99KOHM 0.5% 1/16W 0603", Price(100)=0.023, Supplier 1=DigiKey, Supplier 2=Mouser, Supplier Part Number 2=754-RR0816P-4991D68H, Tech#=SMT
R4: library part "4.99K 0603", "RES SMD 100OHM 0.1% 1/10W 0603", Manufacturer 1=Susumu, Manufacturer Part Number 1=RG1608P-101-B-T5, Supplier Part Number 1=RR08P4.99KDCT-ND, Detailed Description="RES SMD 4.99KOHM 0.5% 1/16W 0603", Price(100)=0.023, Supplier 1=DigiKey, Supplier 2=Mouser, Supplier Part Number 2=754-RR0816P-4991D68H, Tech#=SMT
R5: library part PVG5A102C03R00, "TRIMMER-SMD 4MM SQ MT CERMET Square / 12 turn / Sealed", Package="SMD-3 Bourns", Check_prices=https://www.snapeda.com/parts/PVG5A102C03R00/Bourns/view-part/?ref=eda, MF=Bourns, MP=PVG5A102C03R00, SnapEDA_Link=https://www.snapeda.com/parts/PVG5A102C03R00/Bourns/view-part/?ref=snap
R6 R22 R39: library part "4.99K 0603", "RES SMD 22OHM 0.1% 1/10W 0603", Manufacturer 1=YAGEO, Manufacturer Part Number 1=RT0603BRD0722RL, Supplier Part Number 1=13-RT0603BRD0722RLCT-ND, Detailed Description="RES SMD 22OHM 0.1% 1/10W 0603", Price(100)=0.023, Supplier 1=DigiKey, Supplier 2=Mouser, Supplier Part Number 2=754-RR0816P-4991D68H, Tech#=SMT
R9 R11 R43: library part "4.99K 0603", "RES SMD 4.99KOHM 0.1% 1/10W 0603", Manufacturer 1=Susumu, Manufacturer Part Number 1=RG1608P-4991-B-T5, Supplier Part Number 1=RG16P4.99KBCT-ND, Detailed Description="RES SMD 4.99KOHM 0.1% 1/10W 0603", Price(100)=0.023, Supplier 1=DigiKey, Supplier 2=Mouser, Supplier Part Number 2=754-RR0816P-4991D68H, Tech#=SMT
R12 R13 R26 R27 R32 R33 R42: library part "4.99K 0603", "RES SMD 412OHM 0.1% 1/10W 0603", Manufacturer 1=YAGEO, Manufacturer Part Number 1=RT0603BRD07412RL, Supplier Part Number 1=YAG1659CT-ND, Detailed Description="RES SMD 412OHM 0.1% 1/10W 0603", Price(100)=0.023, Supplier 1=DigiKey, Supplier 2=Mouser, Supplier Part Number 2=754-RR0816P-4991D68H, Tech#=SMT
R14 R15 R44: library part "4.99K 0603", "RES SMD 1MOHM 0.1% 1/10W 0603", Manufacturer 1=YAGEO, Manufacturer Part Number 1=RT0603BRD071ML, Supplier Part Number 1=YAG4498CT-ND, Detailed Description="RES SMD 1OHM 0.1% 1/10W 0603", Price(100)=0.023, Supplier 1=DigiKey, Supplier 2=Mouser, Supplier Part Number 2=754-RR0816P-4991D68H, Tech#=SMT
R17 R45: library part "4.99K 0603", "RES SMD 10OHM 0.05% 1/10W 0603", Manufacturer 1="Stackpole Electronics", Manufacturer Part Number 1=RNCF0603AKT10R0, Supplier Part Number 1=RNCF0603AKT10R0CT-ND, Detailed Description="RES SMD 10OHM 0.05% 1/10W 0603", Price(100)=0.023, Supplier 1=DigiKey, Supplier 2=Mouser, Supplier Part Number 2=754-RR0816P-4991D68H, Tech#=SMT
R18: library part "4.99K 0603", "RES SMD 100OHM 0.05% 1/10W 0603", Manufacturer 1=Susumu, Manufacturer Part Number 1=RG1608N-101-W-T1, Supplier Part Number 1=RG16N100WCT-ND, Detailed Description="RES SMD 100OHM 0.05% 1/10W 0603", Price(100)=0.023, Supplier 1=DigiKey, Supplier 2=Mouser, Supplier Part Number 2=754-RR0816P-4991D68H, Tech#=SMT
R19: library part "4.99K 0603", "RES SMD 49.9OHM 0.05% 1/10W 0603", Manufacturer 1=Susumu, Manufacturer Part Number 1=RG1608N-49R9-W-T1, Supplier Part Number 1=408-RG1608N-49R9-W-T1CT-ND, Detailed Description="RES SMD 49.9OHM 0.1% 1/10W 0603", Price(100)=0.023, Supplier 1=DigiKey, Supplier 2=Mouser, Supplier Part Number 2=754-RR0816P-4991D68H, Tech#=SMT
R23 R24 R29 R30: library part "4.99K 0603", "RES SMD 210OHM 0.1% 1/10W 0603", Manufacturer 1=YAGEO, Manufacturer Part Number 1=RT0603BRD07210RL, Supplier Part Number 1=YAG4502CT-ND, Detailed Description="RES SMD 210OHM 0.1% 1/10W 0603", Price(100)=0.023, Supplier 1=DigiKey, Supplier 2=Mouser, Supplier Part Number 2=754-RR0816P-4991D68H, Tech#=SMT
R25 R28 R31 R34: library part "4.99K 0603", "RES SMD 1.87KOHM 0.1% 1/10W 0603", Manufacturer 1=YAGEO, Manufacturer Part Number 1=RT0603BRD071K87L, Supplier Part Number 1=YAG4497CT-ND, Detailed Description="RES SMD 1.87KOHM 0.1% 1/10W 0603", Price(100)=0.023, Supplier 1=DigiKey, Supplier 2=Mouser, Supplier Part Number 2=754-RR0816P-4991D68H, Tech#=SMT
R35 R36: library part "4.99K 0603", "RES SMD 33OHM 0.1% 1/10W 0603", Manufacturer 1=YAGEO, Manufacturer Part Number 1=RT0603BRD0733RL, Supplier Part Number 1=13-RT0603BRD0733RLCT-ND, Detailed Description="RES SMD 33OHM 0.1% 1/10W 0603", Price(100)=0.023, Supplier 1=DigiKey, Supplier 2=Mouser, Supplier Part Number 2=754-RR0816P-4991D68H, Tech#=SMT
RN1 RN2: library part ACASA1002S1002P1AT, "4 resistor, resistor network in a 8 pin DIP package"
RN3: library part ACASN1002S1002P1AT, "2 resistor, resistor network, 10k/10k 0.1% abs. and 0.05% rel., 0606, 25ppm"
U1: library part CMP-12105-000115-1, "IC MCU 32BIT 128KB FLASH 32LQFP", Case/Package=LQFP, Frequency=64MHz, Max Operating Temperature=85°C, Min Operating Temperature=-40°C, Core Architecture=ARM, Interface=I2C, Memory Size=128KB, Memory Type=FLASH, Number of I/Os=30, Number of Pins=32, Oscillator Type=Internal, Packaging="Cut Tape", Peripherals="Brown-out Detect/Reset", RoHS Compliant=Yes
U2: "Description", Manufacturer_Name="Diodes Inc", Copyright="Copyright (C) 2025 Ultra Librarian. All rights reserved.", Manufacturer_Part_Number=D3V3F4U6S-7, RefDes=RefDes, Type=Type
U3: "Direct Digital Synthesis IC 10 b 16 MHz 28 b Tuning 10-LFCSP-WD (3x3)"
U4: library part CMP-0384-01747-1, "Double Channel Wide Bandwidth Operational Amplifier, 10 MHz BW, 5 V/us SR, Industrial, 8-pin SOP (RM-8), Reel", Amplifiers Per Package=2, Generic Part Number=AD8692, Input Bias Current=200fA, Input Offset Voltage=400uV, Manufacturer="Analog Devices", Automotive Qualified=Yes, Code_JEDEC=MO-187-AA, ComponentLink1Description="Manufacturer URL", ComponentLink1URL=http://www.analog.com/en/index.html, ComponentLink2Description=Datasheet, ComponentLink2URL=http://www.analog.com/static/imported-files/data_sheets/AD8691_8692_8694.pdf, ComponentLink3Description="Package Specification", ComponentLink3URL=http://www.analog.com/static/imported-files/packages/PKG_PDF/MSOP%28RM%29/RM_8.pdf, DatasheetVersion="Rev. E", Iq/Amp=1.05mA, Mounting Technology="Surface Mount", PackageDescription="8-Pin Mini Small Outline Package, Body 3 x 3 mm, Pitch 0.65 mm", PackageReference=RM-8, PartNumber=AD8692ARMZ-REEL, Slew Rate=5V/us, Small Signal Bandwidth=10MHz, V Span Max=6V, V Span Min=2.7V
U5: library part CMP-04895-000439-1, "IC OPAMP GP 4 CIRCUIT 14TSSOP", Case/Package=TSSOP, Max Operating Temperature=125°C, Min Operating Temperature=-40°C, Gain Bandwidth Product=10MHz, Lead Free="Lead Free", Number of Channels=4, RoHS Compliant=Yes
U6: "Series Voltage Reference IC Fixed 2.5V V +/-0.1% 20 mA SOT-23-6", Manufacturer_Name=Microchip, Manufacturer_Part_Number=MCP1502T-25E/CHY, Mouser Part Number=579-MCP1502T-25E/CHY, Geometry.Height=1.45mm, Mouser Price/Stock=https://www.mouser.co.uk/ProductDetail/Microchip-Technology/MCP1502T-25E-CHY?qs=W%2FMpXkg%252BdQ4EOhKykk%2F7dw%3D%3D
U7 U8: "5-V, 4:1, 2-channel general-purpose multiplexer with 1.8-V input logic control 16-TSSOP -40 to 125", Manufacturer_Name="Texas Instruments", Copyright="Copyright (C) 2025 Ultra Librarian. All rights reserved.", Manufacturer_Part_Number=TMUX1209PWR, RefDes=RefDes, Type=TYPE
U9: library part CMP-0272-01748-3, "Low-Cost, Low Noise, 5.5 MHz CMOS Operational Amplifier, 2.2 to 5.5 V, -40 to 125 degC, 14-pin SOP (PW14), Green (RoHS & no Sb/Br)", Manufacturer="Texas Instruments", Total Supply Voltage(Max)(+5V is 5, +/-5V is 10)=5.5, Total Supply Voltage(Min)(+5V is 5, +/-5V is 10)=2.2, CMRR(Min)(dB)=70, Code_JEDEC=MO-153, ComponentLink1Description="Manufacturer URL", ComponentLink1URL=http://www.ti.com/, ComponentLink2Description=Datasheet, ComponentLink2URL=http://www.ti.com/general/docs/lit/getliterature.tsp?genericPartNumber=OPA4377&fileType=pdf, ComponentLink3Description="Package Specification", ComponentLink3URL=http://www.ti.com/litv/pdf/mpds360, DatasheetVersion=SBOS504B, Eco-Plan="Green (RoHS & no Sb/Br)", IIB(Max)(pA)=10, Iq per channel(Max)(mA)=1.05, Mounting Technology="Surface Mount", Number of Channels=4, Offset Drift(Typ)(uV/C)=0.32, PackageDescription="14-Pin Plastic Small Outline, Body 5 x 4.4 mm, Pitch 0.65 mm", PackageReference=PW0014A, PackageVersion="4040064-3/G, 02/2011", PartNumber=OPA4377AIPWR, Slew Rate(Typ)(V/us)=2, Sub Family="Low Input Bias Current Amp (<=10pA), Low Noise Amp (<=10nV/rtHz), Low Supply Voltage Amplifier (<=2.7V), Precision Amplifier", Vio (25C)(Max)(mV)=1, Vn at 1kHz(Typ)(nV/rtHz)=7.5
U10: "Dual Channel, Low-Noise, Precision, 150-MHz, Fully Differential Amplifier 16-TSSOP -40 to 125", Manufacturer_Name="Texas Instruments", Copyright="Copyright (C) 2025 Ultra Librarian. All rights reserved.", Manufacturer_Part_Number=THS4552IPWT, RefDes=RefDes, Type=TYPE
U11: "14-Bit, 1MSPS, Differential Input, Small-Size Low-Power SAR ADC 8-X2QFN -40 to 125", Manufacturer_Name="Texas Instruments", Copyright="Copyright (C) 2026 Ultra Librarian. All rights reserved.", Manufacturer_Part_Number=ADS7054IRUGR, RefDes=RefDes, Type=TYPE
U12: library part CMP-0133-00143-2, "IC CONTROLLR LI-ION 4.2V SOT23-5", Case/Package=SOT-23, Drain to Source Resistance=350mR, Max Charge Current=500mA, Max Input Voltage=6V, Max Operating Temperature=85°C, Max Output Voltage=4.5V, Max Power Dissipation=1.54W, Min Operating Temperature=-40°C, Min Output Voltage=4.168V, Min Supply Voltage=3.75V, Output Voltage=4.2V, Voltage Rating=4.534V, Contact Plating=Tin, Height=0.051inch, Lead Free="Lead Free", Length=0.122inch, Max Supply Voltage=6V, Mount="Surface Mount", Number of Cells=1, Number of Channels=1, Number of Outputs=1, Number of Pins=5, Output Current=500mA, Packaging="Tape and Reel", Radiation Hardening=No, REACH SVHC="No SVHC", Termination=SMD/SMT, Weight=0.00709oz, Width=0.071inch
U13 U16: library part TPS7A0230PDBVR, "200mA, nanopower-IQ (25 nA), low-dropout (LDO) voltage regulator with enable 5-SOT-23 -40 to 125", Manufacturer_Name="Texas Instruments", Copyright="Copyright (C) 2026 Ultra Librarian. All rights reserved.", Manufacturer_Part_Number=TPS7A0230PDBVR, RefDes=RefDes, Type=Type
U14: "5.5-V, 2-A, 80-mÎ© , 10-nA leakage load switch adj. rise time and adj output discharge 6-SOT-23 -40 to 125", Manufacturer_Name="Texas Instruments", Copyright="Copyright (C) 2026 Ultra Librarian. All rights reserved.", Manufacturer_Part_Number=TPS22917DBVT, RefDes=RefDes, Type=TYPE
U15: library part CMP-0391-00039-2, "5.5 V, Buck / Boost Charge Pump, 60 mA, 3 to 5.5 V Input with 2-Cell Alkaline / Nixx Input, -40 to 85 degC, 6-pin SOT23 (DDC6), Green (RoHS & no Sb/Br)", Manufacturer="Texas Instruments", Switching Frequency(Max)(kHz)=1000, 2-Cell Alkaline/Nixx Input=TRUE, Code_JEDEC=MO-193, ComponentLink1Description="Manufacturer URL", ComponentLink1URL=http://www.ti.com/, ComponentLink2Description=Datasheet, ComponentLink2URL=http://www.ti.com/general/docs/lit/getliterature.tsp?genericPartNumber=REG71055&fileType=pdf, ComponentLink3Description="Package Specification", ComponentLink3URL=http://www.ti.com/litv/pdf/mpds124d, DatasheetVersion=SBAS221G, Eco-Plan="Green (RoHS & no Sb/Br)", Efficiency(Typ)(%)=90, Iout(Max)(A)=0.06, Iq(Typ)(mA)=0.065, Mounting Technology="Surface Mount", PackageDescription="6-Pin Plastic Small Outline, Body 2.9 x 1.6 mm, 0.95 mm Pitch", PackageReference=DDC0006A, PackageVersion=4204403-3/E, PartNumber=REG71055DDCR, Preset Vout(V)=5.5, Topology=Buck/Boost, Vin(Max)(V)=5.5, Vin(Min)(V)=3, Vout(Max)(V)=5.8, Vout(Min)(V)=5.2
Y1: library part WE-SPXO_CFPS-73, Package=None, Availability=Unavailable, MF="{'manufacturer': u'W\xfcrth Elektronik'}", MP=831018043, Price=None

## Via types
v1: diameter 0.5, hole 0.3, Top Layer to Bottom Layer, tented both sides, 307 vias

## Nets (pads, with @x,y where several pads share a name; then routed paths per layer and width w, separated by ;. In a path a pad name is that pad's centre, name@x,y a point inside that pad or via, vN(x,y) a via of type N, cw(c..) or ccw(c..) an arc to the next point about the centre after c; other vN are vias at no path point)
+1.65V: +1.65V.1 C27.1 C32.1 C41.1 DNP11.2 R39.2 U10.4 U10.8 | length 86.8
  Top Layer w0.254: DNP11.2@8.125,53.875 8.375,53.625 +1.65V.1@8.375,51.35 ; C27.1@49.9,34.3 49.9,34.338 50.208,34.646 50.246,34.646 51.1,35.5 v1(51.1,36.625) ; C32.1@51.5,44.1 51.525,44.125 v1(51.525,45.1) ; v1(52.842,37.51) 52.906,37.51 53.258,37.863 53.336,37.863 53.434,37.961 U10.4@53.962,37.961 54,37.999 54.605,37.999 54.989,38.382 54.989,40.14 54.666,40.463 54.588,40.463 54.49,40.561 U10.8@53.962,40.561 53.54,40.561 53.449,40.652 53.449,41.159 53.1,41.508 v1(53.1,41.575) ; v1(69.175,44.2) 69.175,43.125 C41.1@69.2,43.1 R39.2@71.087,43.1
  Bottom Layer w0.254: +1.65V.1@8.375,51.35 14.575,45.15 42.089,45.15 cw(c43.5,42.747) 43.5,45.534 cw(c43.5,44.2) 44.175,45.35 51.275,45.35 v1(51.525,45.1) 51.525,43.15 v1(53.1,41.575) 56.809,45.284 68.091,45.284 v1(69.175,44.2) ; v1(51.1,36.625) 51.957,36.625 v1(52.842,37.51)
+2.5V: +2.5V.1 C19.1 JP3.3 R3.2 R16.2 U6.1 | length 45.7
  Top Layer w0.254: R16.2@13.338,62.525 15.925,62.525 17.225,61.225 18.288,61.225 18.646,60.867 18.646,59.355 19.538,58.463 R3.2@19.538,58.425 ; R3.2@19.538,58.425 v1(20.7,58.425) ; v1(22.375,55.15) 22.375,54.048 24.7,51.723 27.048,51.723 27.675,52.35 U6.1@27.95,52.35 30.05,52.35 C19.1@30.1,52.3 30.138,52.3 30.738,51.7 ; +2.5V.1@33.4,51.7 30.738,51.7 ; JP3.3@46.9,46.96 35.478,46.96 30.738,51.7
  Bottom Layer w0.254: v1(20.7,58.425) 20.7,56.825 v1(22.375,55.15)
+3.3V: +3.3V.1 C6.1 C7.1 C20.1 C21.1 C23.1 C28.1 C33.1 C36.1 C37.1 C38.1 C39.1 C40.1 DNP13.2 JP4.3 JP6.3 R37.2 U3.2 U7.2 U7.14 U8.2 U8.14 U9.4 U10.1 U10.5 U10.9 U10.13 U11.4 U11.6 U14.5 U14.6 U15.3 | length 267.9
  Top Layer w0.2: C6.1@11.367,45.783 11.648,46.064 11.71,46.064 11.846,46.2 12.724,46.2 13.122,45.802 13.577,45.802 U3.2@13.605,45.775 ; C37.1@27.2,37.676 27.424,37.9 27.462,37.9 U11.6@29.125,37.9
  Top Layer w0.254: JP4.3@40.32,73.2 46.753,66.767 56.899,66.767 57.902,65.764 57.902,64.436 57.721,64.255 57.721,64.013 57.325,63.617 v1(57.325,63.55) 57.325,63.483 57.487,63.321 57.487,62.288 U7.2@57.525,62.25 ; v1(46.85,38.675) 46.897,38.628 46.897,38.52 47.358,38.059 47.436,38.059 47.534,37.961 U10.13@48.062,37.961 ; U10.9@48.062,40.561 51.5,40.561 ; C33.1@51.5,42.2 51.5,40.561 ; v1(52.05,33.2) 52.05,34.226 C28.1@51.976,34.3 51.976,36.011 ; U10.1@53.962,36.011 51.976,36.011 ; U10.5@53.962,38.611 v1(51.539,38.611) v1@51.5,38.65 ; v1(54.7,54.15) 56.55,54.15 C20.1@56.6,54.2 ; U7.14@56.875,56.35 56.849,56.324 56.849,54.449 C20.1@56.6,54.2 ; v1(59.1,70.55) 59.1,71.2 JP6.3@61.2,73.3 ; v1(67.175,53.15) 67.615,52.71 ; U8.2@70.7,56.4 70.662,56.362 70.662,55.757 67.615,52.71 ; v1@51.5,38.65 51.5,37.867 51.976,37.391 51.976,36.011 ; v1@51.5,38.65 51.5,40.561 ; C20.1@56.6,54.2 56.6,54.162 59.263,51.499 66.405,51.499 67.615,52.71
  Top Layer w0.3: U11.4@30,38.8 30,40.28 30.008,40.288
  Top Layer w0.4: v1@10.227,45.025 10.812,44.44 11.186,44.44 C7.1@11.367,44.259 ; U15.3@10.875,69.95 10.75,69.825 10.238,69.825 9.433,69.02 9.433,66.022 9.146,65.735 8.504,65.735 7.415,64.646 7.415,64.004 4.45,61.039 4.45,50.775 v1(10.2,45.025) 10.219,45.044 10.59,45.044 11.329,45.783 C6.1@11.367,45.783 ; DNP13.2@22.125,33.738 23.713,33.738 24.175,34.2 U14.6@24.175,34.4 U14.5@25.125,34.4 25.125,37.339 C36.1@25.462,37.676 ; v1(22.275,44.275) 22.275,40.901 25.281,37.895 25.281,37.857 C36.1@25.462,37.676 ; C36.1@25.5,37.676 C36.1@25.462,37.676 ; C37.1@27.2,37.676 C36.1@25.462,37.676 ; C37.1@27.462,37.9 28.096,38.533 28.096,39.43 28.953,40.288 C38.1@28.991,40.288 30.008,40.288 C39.1@30.515,40.288 30.553,40.288 31.494,41.228 31.494,42.283 32.361,43.15 39.2,43.15 39.556,42.794 44.083,42.794 44.308,43.019 50.719,43.019 C33.1@51.5,42.238 ; C33.1@51.5,42.2 C33.1@51.5,42.238 ; C20.1@56.6,54.162 56.6,47.338 C33.1@51.5,42.238 ; C23.1@66.5,37.3 66.6,37.2 v1(67.625,37.2) 67.672,37.153 68.508,37.153 69.75,35.911 U9.4@69.75,34.95 ; v1(71.125,63.55) 71.125,63.523 71.34,63.308 71.34,62.31 U8.14@71.35,62.3 71.36,62.29 71.36,61.582 72.966,59.975 C21.1@76.05,59.975 ; C40.1@76.3,40.3 76.356,40.356 76.356,41.206 v1(76.375,41.225) 76.394,41.244 76.394,42.081 R37.2@76.5,42.187
  Bottom Layer w0.254: v1(46.85,38.675) 48.884,38.675 48.961,38.752 49.965,38.752 50.106,38.611 v1(51.539,38.611) ; v1(54.7,54.15) 54.7,60.925 v1(57.325,63.55) 56.723,64.152 56.723,68.273 59,70.55 v1(59.1,70.55) ; v1(67.175,53.15) 68.428,54.403 68.428,62.297 69.681,63.55 v1(71.125,63.55)
  Bottom Layer w0.4: v1(10.2,45.025) 10.95,44.275 v1(22.275,44.275) ; v1(52.05,33.2) 63.625,33.2 ; +3.3V.1@56.275,29.525 57.459,28.341 58.766,28.341 63.625,33.2 ; v1(76.375,41.225) 74.013,41.225 69.988,37.2 v1(67.625,37.2) 63.625,33.2
+3.3V_BAT: +3.3V_BAT.1 C43.1 JP8.3 U13.5 | length 28.9
  Top Layer w0.4: +3.3V_BAT.1@22.4,19.05 26.012,19.05 28.162,21.2 28.238,21.2 29.2,22.162 29.2,23.716 29.434,23.95 45.138,23.95 45.753,23.335 JP8.3@46.125,23.335 ; C43.1@28.35,21.05 U13.5@30.338,21.05
+3.3V_EXT: J8.2 JP8.1 | length 31.3
  Top Layer w0.4: JP8.1@46.125,28.415 46.878,27.662 47.902,27.662 63.95,11.614 J8.2@63.95,5.135
+3.3V_SYS: C1.2 C2.1 C13.2 DNP13.1 J2.1 JP8.2 R45.1 U1.4 U2.5 U14.1 Y1.4 | length 139.2
  Top Layer w0.254: DNP13.1@22.387,31.85 24.002,31.85 24.175,31.677 U14.1@24.175,31.65
  Top Layer w0.4: C13.2@7.312,20.275 7.312,19.049 7.078,18.815 6.96,18.815 6.16,18.015 6.16,17.515 4.76,16.115 4.76,11.269 6.949,9.08 11.753,9.08 13.997,11.325 ; v1(13.775,28.525) 13.043,27.793 13.043,23.133 C2.1@13.076,23.1 13.1,23.076 C1.2@13.1,21.3 13.1,16.582 13.997,15.685 13.997,11.325 ; J2.1@21.6,4.1 21.6,7.353 19.503,9.45 19.497,9.45 18.604,10.344 18.604,10.646 U2.5@18.6,10.65 18.6,11.091 18.341,11.35 17.697,11.35 17.672,11.325 13.997,11.325 ; DNP13.1@22.125,32.112 22.306,31.931 22.306,31.769 v1(23.2,30.875)
  Top Layer w0.5: R45.1@5.9,65.487 5.937,65.45 v1(7.025,65.45)